# EAGLE board SparkX_smol_ESP32-Panel (EAGLE 9.6.2), part 1 of 15
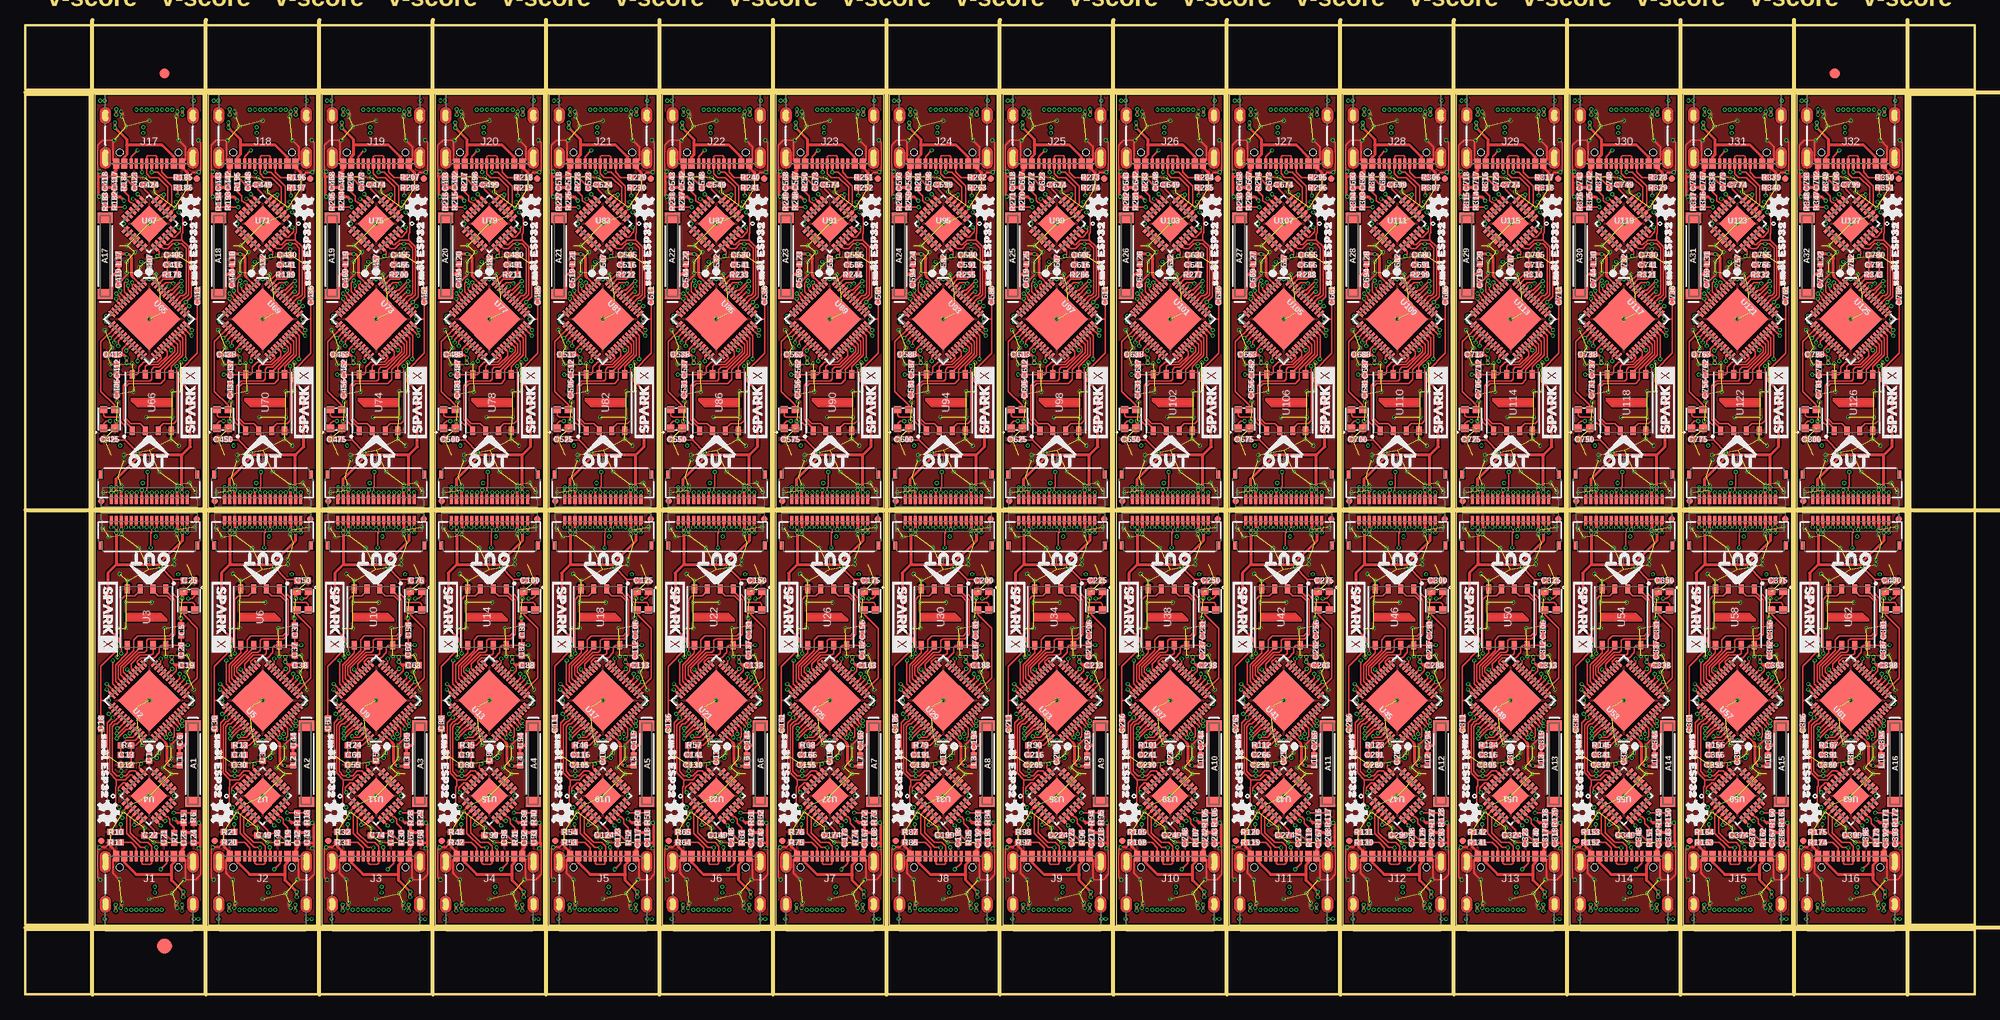
[diagram p0: board, top side]
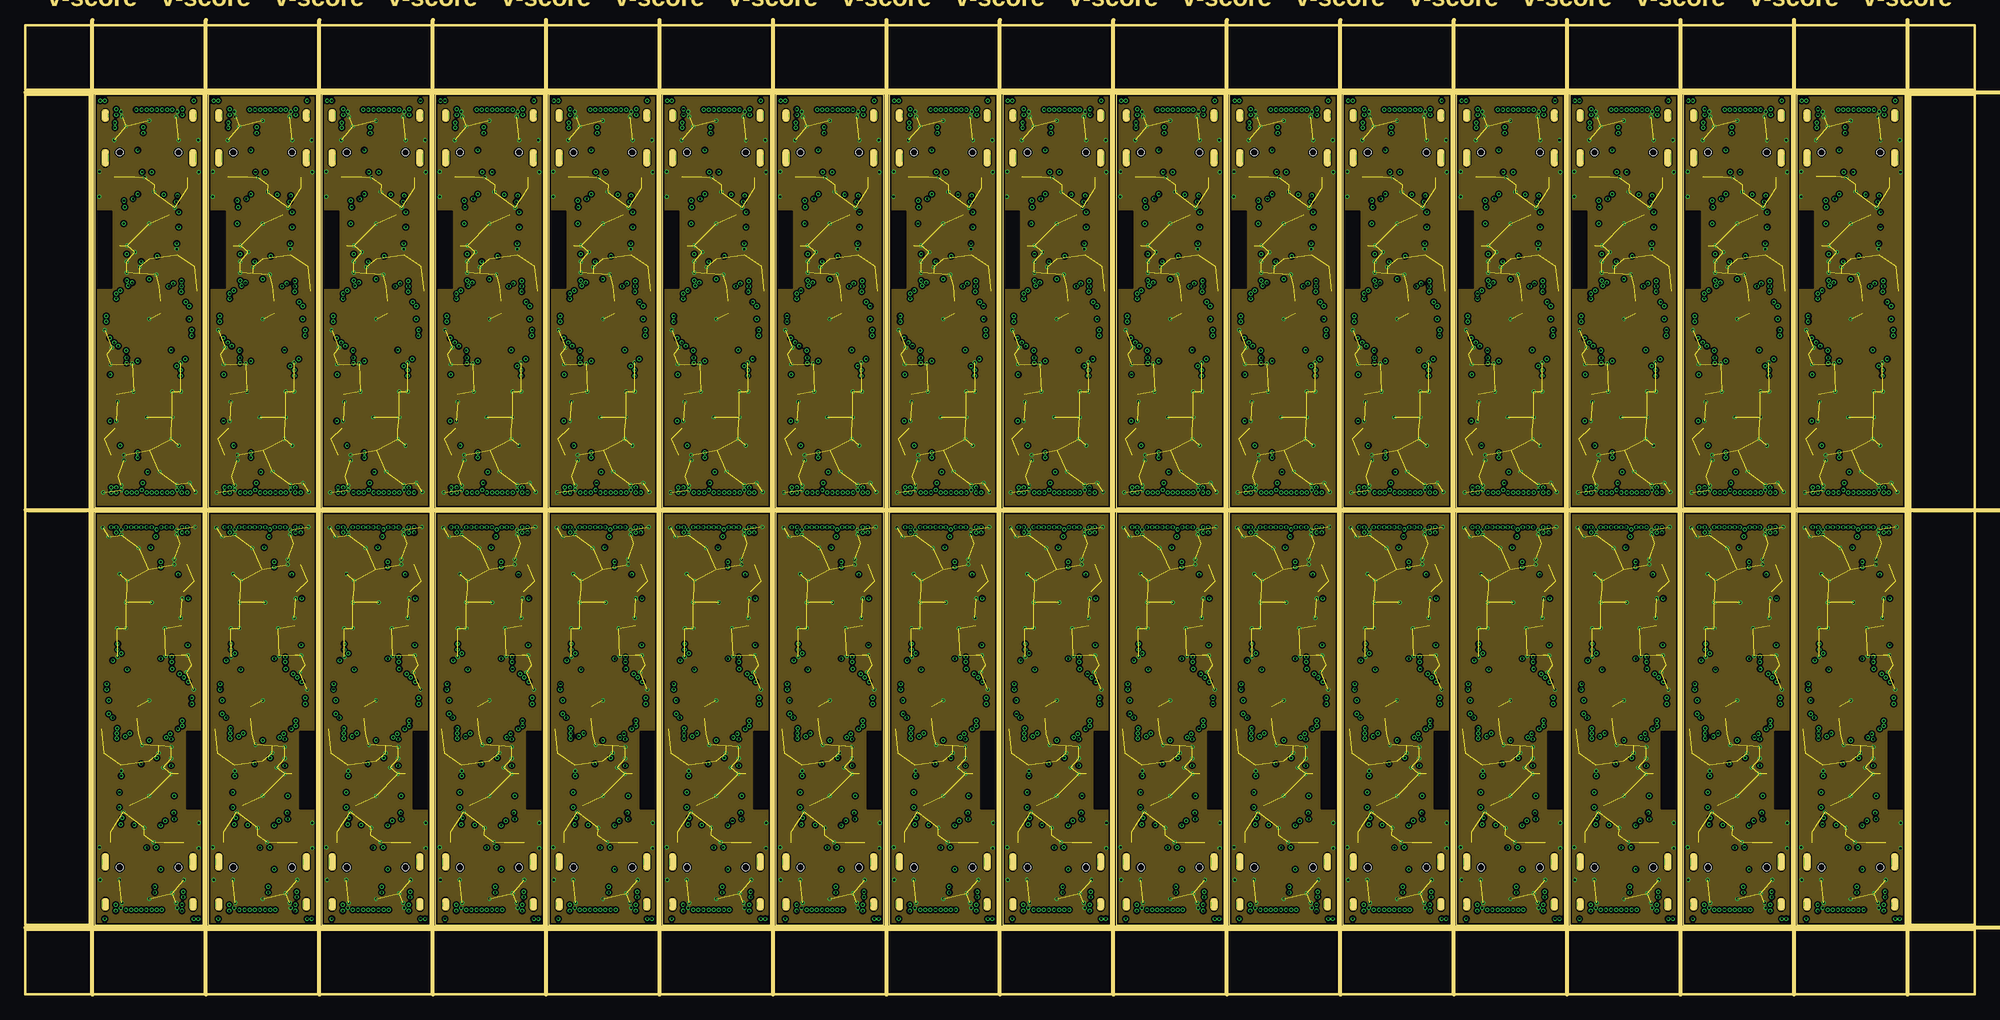
[diagram p1: board, inner layer Route2]
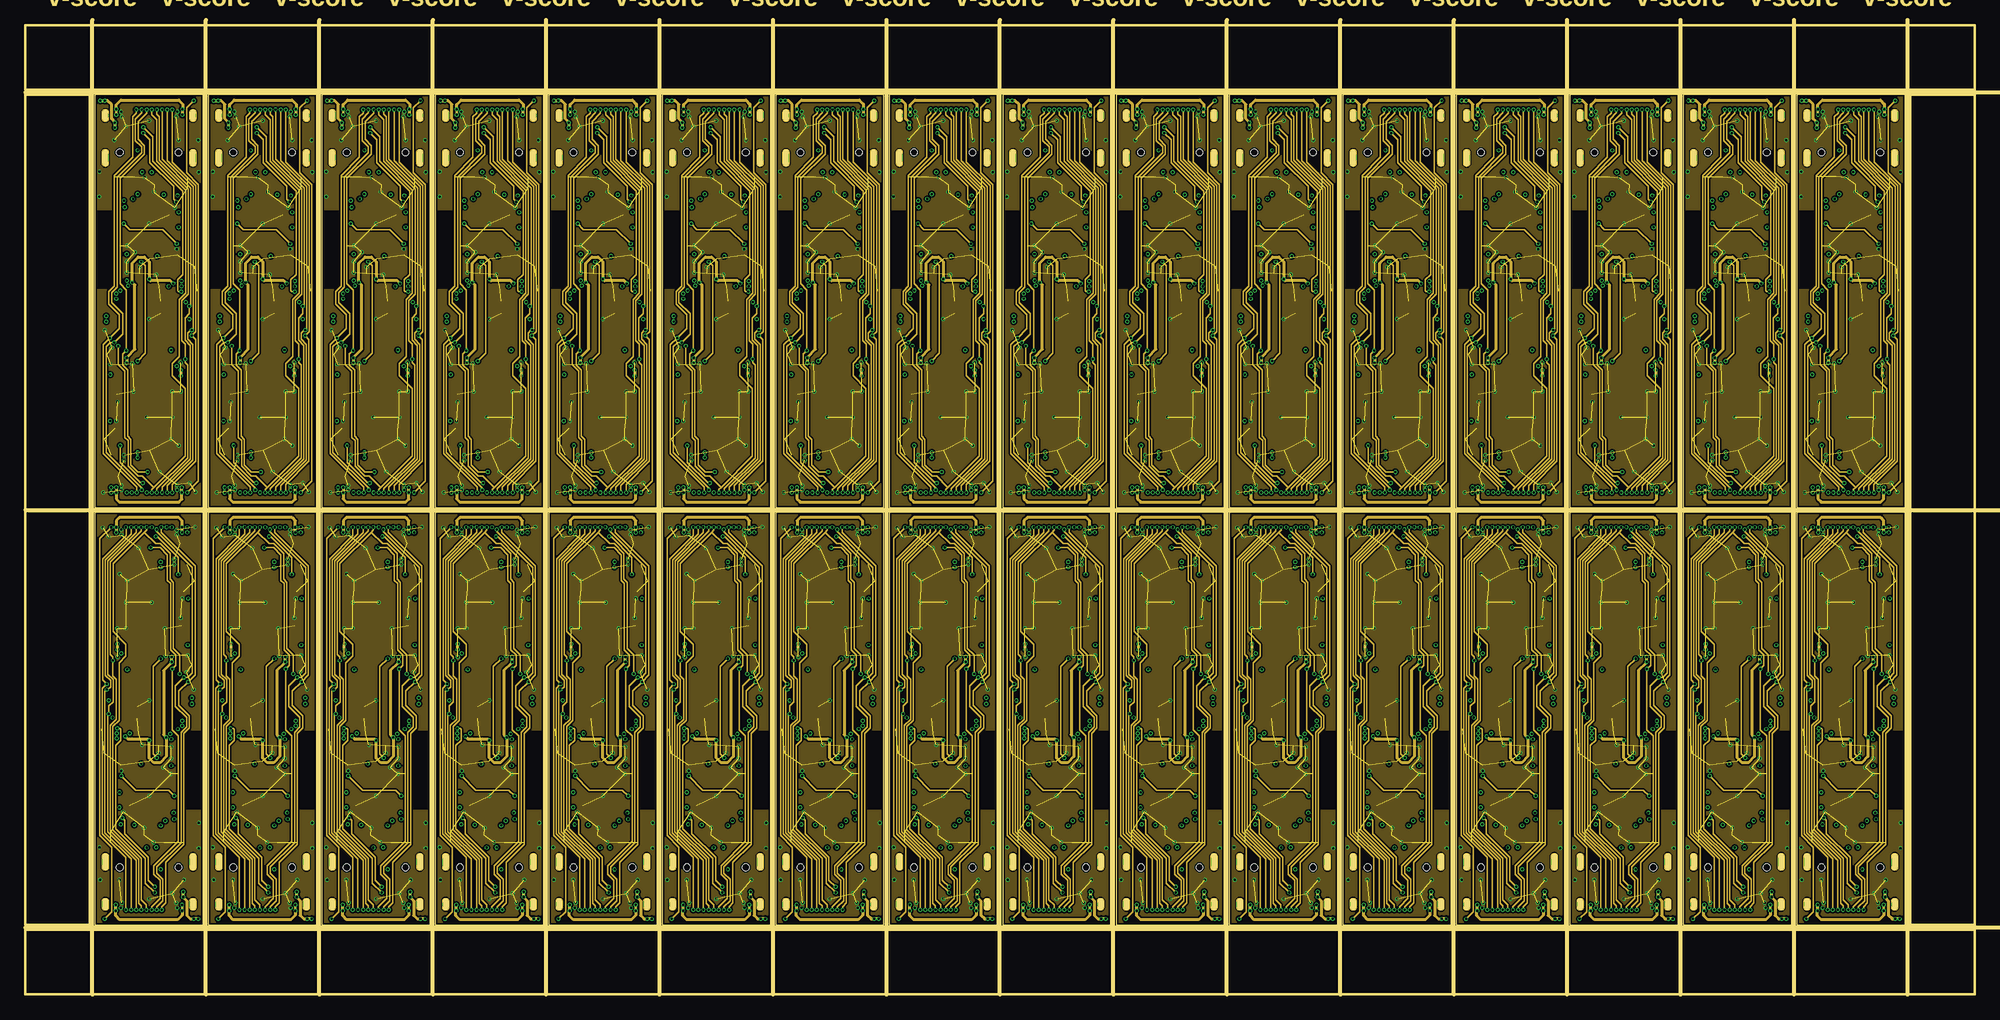
[diagram p2: board, inner layer Route15]
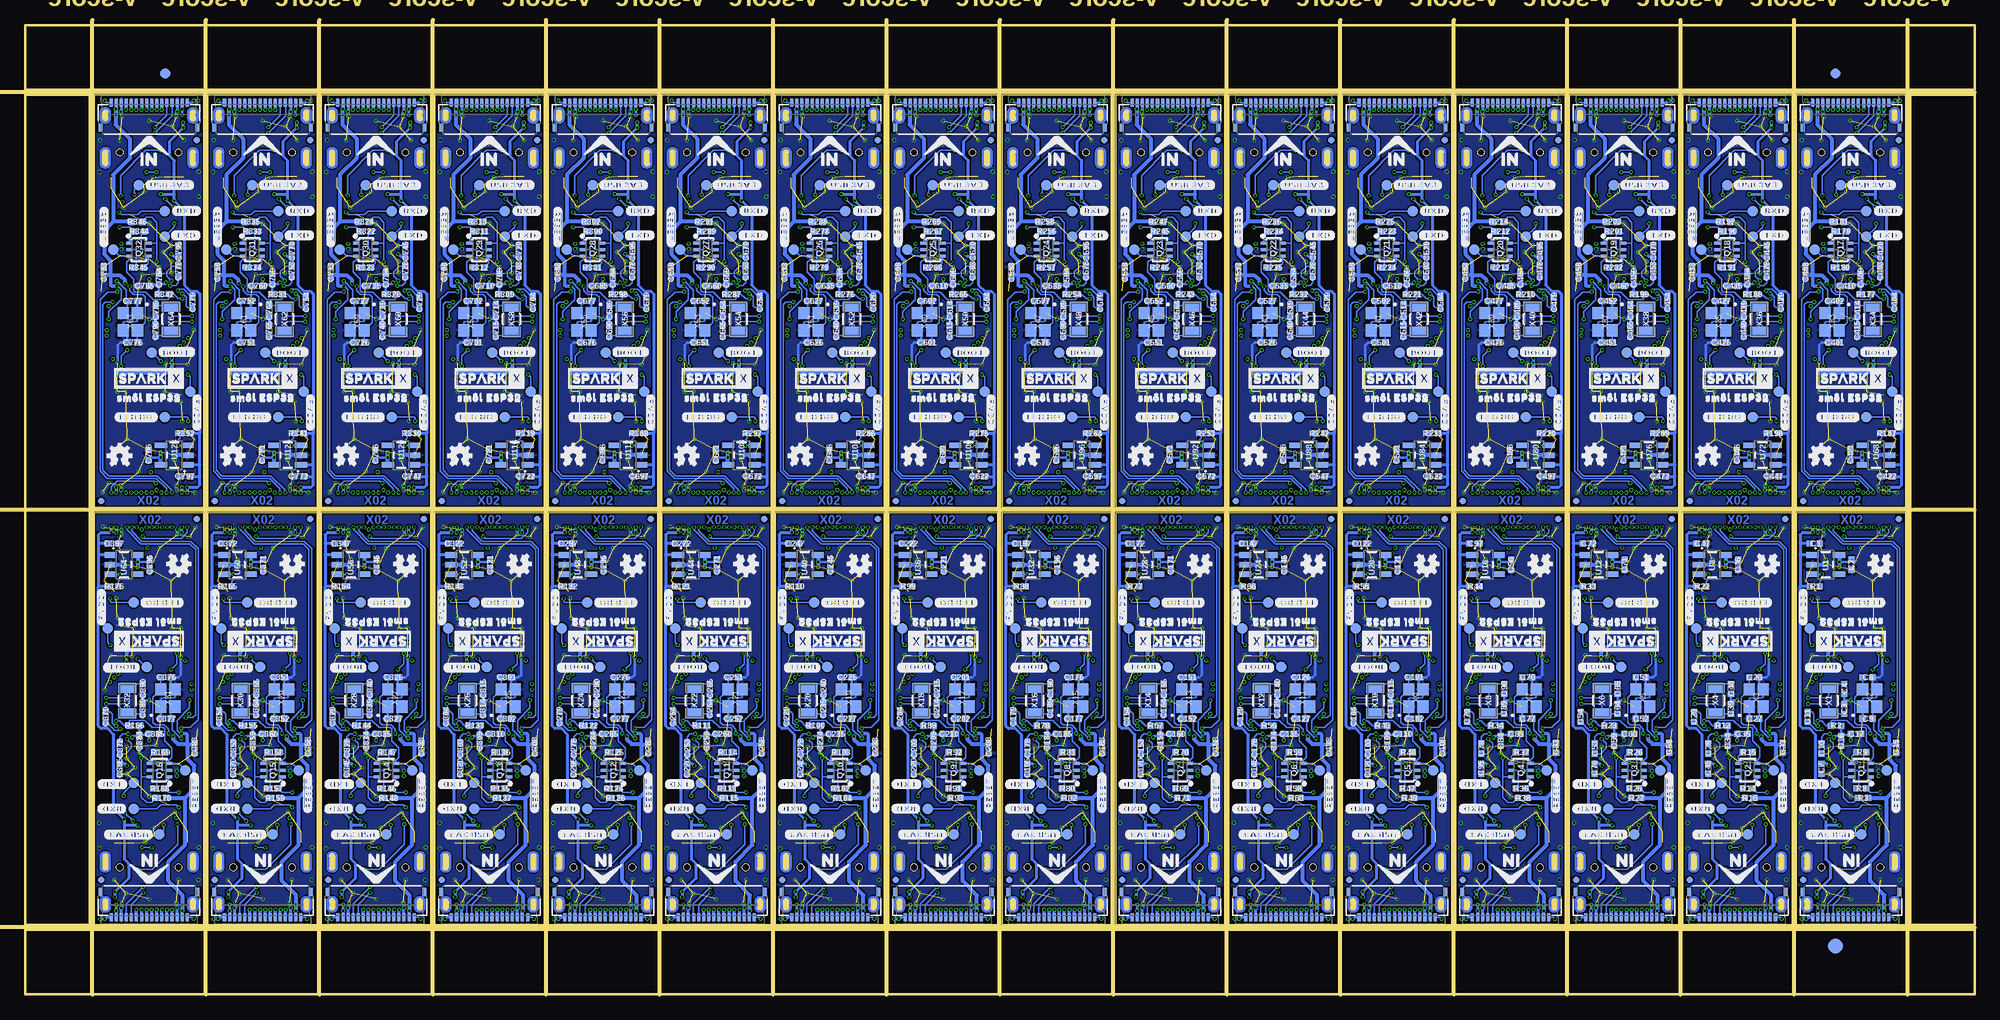
[diagram p3: board, bottom side, seen from below]

Size 192.02 x 95.5 mm. Coordinates in mm from the lower left corner, seen from the top.
Outline: 17.53,6.86 17.53,47.5 6.86,47.5 6.86,6.86 17.53,6.86
Outline: 28.7,6.86 28.7,47.5 18.03,47.5 18.03,6.86 28.7,6.86
Outline: 39.88,6.86 39.88,47.5 29.21,47.5 29.21,6.86 39.88,6.86
Outline: 51.05,6.86 51.05,47.5 40.39,47.5 40.39,6.86 51.05,6.86
Outline: 62.23,6.86 62.23,47.5 51.56,47.5 51.56,6.86 62.23,6.86
Outline: 73.41,6.86 73.41,47.5 62.74,47.5 62.74,6.86 73.41,6.86
Outline: 84.58,6.86 84.58,47.5 73.91,47.5 73.91,6.86 84.58,6.86
Outline: 95.76,6.86 95.76,47.5 85.09,47.5 85.09,6.86 95.76,6.86
Outline: 106.93,6.86 106.93,47.5 96.27,47.5 96.27,6.86 106.93,6.86
Outline: 118.11,6.86 118.11,47.5 107.44,47.5 107.44,6.86 118.11,6.86
Outline: 129.29,6.86 129.29,47.5 118.62,47.5 118.62,6.86 129.29,6.86
Outline: 140.46,6.86 140.46,47.5 129.79,47.5 129.79,6.86 140.46,6.86
Outline: 151.64,6.86 151.64,47.5 140.97,47.5 140.97,6.86 151.64,6.86
Outline: 162.81,6.86 162.81,47.5 152.15,47.5 152.15,6.86 162.81,6.86
Outline: 173.99,6.86 173.99,47.5 163.32,47.5 163.32,6.86 173.99,6.86
Outline: 185.17,6.86 185.17,47.5 174.5,47.5 174.5,6.86 185.17,6.86
Outline: 6.86,88.65 6.86,48.01 17.53,48.01 17.53,88.65 6.86,88.65
Outline: 18.03,88.65 18.03,48.01 28.7,48.01 28.7,88.65 18.03,88.65
Outline: 29.21,88.65 29.21,48.01 39.88,48.01 39.88,88.65 29.21,88.65
Outline: 40.39,88.65 40.39,48.01 51.05,48.01 51.05,88.65 40.39,88.65
Outline: 51.56,88.65 51.56,48.01 62.23,48.01 62.23,88.65 51.56,88.65
Outline: 62.74,88.65 62.74,48.01 73.41,48.01 73.41,88.65 62.74,88.65
Outline: 73.91,88.65 73.91,48.01 84.58,48.01 84.58,88.65 73.91,88.65
Outline: 85.09,88.65 85.09,48.01 95.76,48.01 95.76,88.65 85.09,88.65
Outline: 96.27,88.65 96.27,48.01 106.93,48.01 106.93,88.65 96.27,88.65
Outline: 107.44,88.65 107.44,48.01 118.11,48.01 118.11,88.65 107.44,88.65
Outline: 118.62,88.65 118.62,48.01 129.29,48.01 129.29,88.65 118.62,88.65
Outline: 129.79,88.65 129.79,48.01 140.46,48.01 140.46,88.65 129.79,88.65
Outline: 140.97,88.65 140.97,48.01 151.64,48.01 151.64,88.65 140.97,88.65
Outline: 152.15,88.65 152.15,48.01 162.81,48.01 162.81,88.65 152.15,88.65
Outline: 163.32,88.65 163.32,48.01 173.99,48.01 173.99,88.65 163.32,88.65
Outline: 174.5,88.65 174.5,48.01 185.17,48.01 185.17,88.65 174.5,88.65
Outline: 0,6.35 192.02,6.35 192.02,0 0,0 0,6.35
Outline: 185.67,88.65 192.02,88.65 192.02,6.86 185.67,6.86 185.67,88.65
Outline: 0,95.5 192.02,95.5 192.02,89.15 0,89.15 0,95.5
Outline: 0,88.65 6.35,88.65 6.35,6.86 0,6.86 0,88.65
Copper layers (1+2*15+16): Top 0.035mm / dielectric 0.2mm / Route2 0.0175mm / dielectric 0.265mm / Route15 0.0175mm / dielectric 0.2mm / Bottom 0.035mm
Design rules "SparkX_smol_ESP32": minimum track width 5mil, minimum drill 0.2mm, track to track 5mil, track to pad 5mil, pad to pad 5mil, via to via 5mil, smd to smd 0mil, copper to edge 5mil, drill to drill 5mil, minimum pad ring 3.5mil, minimum via ring 3.5mil, stop-mask expansion 2.5mil, vias tented up to drill 25mil, thermal gap 10mil
Milling: 20 lines

## Footprints (pad centres in the part's own frame; a part is rotated, then mirrored left to right if it is on the bottom)
PAD.03X.04 = smd 1.016 x 1.016: 1 0,0
ANT-2.4GHZ-8.0X1.0MM = smd 1 x 1.5: FEED -3.75,0; NC 3.75,0
0402-TIGHT = smd 0.6 x 0.6: 1 -0.5,0; 2 0.5,0
0402-TIGHT_NO_CREAM = smd 0.6 x 0.6: 1 -0.5,0; 2 0.5,0
WS2812-2020 = smd 0.7 x 0.7: DI -0.915,0.55; DO 0.915,-0.55; GND 0.915,0.55; VCC -0.915,-0.55
FIDUCIAL-1X2 = smd 1 x 1: 1 0,0
FIDUCIAL-1.5X3 = smd 1.5 x 1.5: 1 0,0
FIDUCIAL-MICRO = smd 0.635 x 0.635: 1 0,0
FPC_16_0.5MM = smd 0.3 x 0.8: 1 -3.75,1.35; 2 -3.25,1.35; 3 -2.75,1.35; 4 -2.25,1.35; 5 -1.75,1.35; 6 -1.25,1.35; 7 -0.75,1.35; 8 -0.25,1.35; 9 0.25,1.35; 10 0.75,1.35; 11 1.25,1.35; 12 1.75,1.35; 13 2.25,1.35; 14 2.75,1.35; 15 3.25,1.35; 16 3.75,1.35 | smd 0.4 x 0.8: MP1 -4.75,-1.15; MP2 4.75,-1.15
USB-C-16P_4LAYER-PADS = smd 0.3 x 1: A5 -1.25,-0.34; A6 -0.25,-0.34; A7 0.25,-0.34; A8 1.25,-0.34; B5 1.75,-0.34; B6 0.75,-0.34; B7 -0.75,-0.34; B8 -1.75,-0.34 | smd 0.6 x 1: GND -3.225,-0.34; GND2 3.225,-0.34; VBUS1 -2.45,-0.34; VBUS2 2.45,-0.34 | drill 0.4 pad 0.6 long: SHLD1 -4.318,-0.915; SHLD2 4.318,-0.915; SHLD3 -4.318,-5.095; SHLD4 4.318,-5.095 | hole 0.65: -2.89,-1.445; 2.89,-1.445
SC70-6 = smd 0.3 x 0.66: 1 -0.65,-0.92; 2 0,-0.92; 3 0.65,-0.92; 4 0.65,0.92; 5 0,0.92; 6 -0.65,0.92
SOT23-5 = smd 0.55 x 1.2: 1 -0.95,-1.3; 2 0,-1.3; 3 0.95,-1.3; 4 0.95,1.3; 5 -0.95,1.3
QFN48-0.4MM = smd 0.8 x 0.23: 1 -2.95,2.2; 2 -2.95,1.8; 3 -2.95,1.4; 4 -2.95,1; 5 -2.95,0.6; 6 -2.95,0.2; 7 -2.95,-0.2; 8 -2.95,-0.6; 9 -2.95,-1; 10 -2.95,-1.4; 11 -2.95,-1.8; 12 -2.95,-2.2; 25 2.95,-2.2; 26 2.95,-1.8; 27 2.95,-1.4; 28 2.95,-1; 29 2.95,-0.6; 30 2.95,-0.2; 31 2.95,0.2; 32 2.95,0.6; 33 2.95,1; 34 2.95,1.4; 35 2.95,1.8; 36 2.95,2.2 | smd 0.23 x 0.8: 13 -2.2,-2.95; 14 -1.8,-2.95; 15 -1.4,-2.95; 16 -1,-2.95; 17 -0.6,-2.95; 18 -0.2,-2.95; 19 0.2,-2.95; 20 0.6,-2.95; 21 1,-2.95; 22 1.4,-2.95; 23 1.8,-2.95; 24 2.2,-2.95; 37 2.2,2.95; 38 1.8,2.95; 39 1.4,2.95; 40 1,2.95; 41 0.6,2.95; 42 0.2,2.95; 43 -0.2,2.95; 44 -0.6,2.95; 45 -1,2.95; 46 -1.4,2.95; 47 -1.8,2.95; 48 -2.2,2.95 | smd 4.3 x 4.3: EP 0,0
WSON-8-6X5-SKINNY_CENTERPAD = smd 0.85 x 0.5: 1 -2.775,1.905; 2 -2.775,0.635; 3 -2.775,-0.635; 4 -2.775,-1.905; 5 2.775,-1.905; 6 2.775,-0.635; 7 2.775,0.635; 8 2.775,1.905
QFN24 = smd 0.85 x 0.3: 1 -2.05,1.25; 2 -2.05,0.75; 3 -2.05,0.25; 4 -2.05,-0.25; 5 -2.05,-0.75; 6 -2.05,-1.25; 13 2.05,-1.25; 14 2.05,-0.75; 15 2.05,-0.25; 16 2.05,0.25; 17 2.05,0.75; 18 2.05,1.25 | smd 0.3 x 0.85: 7 -1.25,-2.05; 8 -0.75,-2.05; 9 -0.25,-2.05; 10 0.25,-2.05; 11 0.75,-2.05; 12 1.25,-2.05; 19 1.25,2.05; 20 0.75,2.05; 21 0.25,2.05; 22 -0.25,2.05; 23 -0.75,2.05; 24 -1.25,2.05 | smd 2.55 x 2.55: PAD 0,0
CRYSTAL-SMD-3.2X1.5MM = smd 1 x 1.8: P$1 -1.25,0; P$2 1.25,0
CRYSTAL-SMD-2X2.5MM = smd 1.2 x 1.1: P1 0.846,0.69; P2 -0.854,0.69; P3 -0.854,-0.71; P4 0.846,-0.71

## Placement (x,y rotation side)
!BOOT!  TEST-POINT3X4  [PAD.03X.04]  12.45,32.26 180 bottom
!BOOT!1  TEST-POINT3X4  [PAD.03X.04]  23.62,32.26 180 bottom
!BOOT!2  TEST-POINT3X4  [PAD.03X.04]  34.8,32.26 180 bottom
!BOOT!3  TEST-POINT3X4  [PAD.03X.04]  45.97,32.26 180 bottom
!BOOT!4  TEST-POINT3X4  [PAD.03X.04]  57.15,32.26 180 bottom
!BOOT!5  TEST-POINT3X4  [PAD.03X.04]  68.33,32.26 180 bottom
!BOOT!6  TEST-POINT3X4  [PAD.03X.04]  79.5,32.26 180 bottom
!BOOT!7  TEST-POINT3X4  [PAD.03X.04]  90.68,32.26 180 bottom
!BOOT!8  TEST-POINT3X4  [PAD.03X.04]  101.85,32.26 180 bottom
!BOOT!9  TEST-POINT3X4  [PAD.03X.04]  113.03,32.26 180 bottom
!BOOT!10  TEST-POINT3X4  [PAD.03X.04]  124.21,32.26 180 bottom
!BOOT!11  TEST-POINT3X4  [PAD.03X.04]  135.38,32.26 180 bottom
!BOOT!12  TEST-POINT3X4  [PAD.03X.04]  146.56,32.26 180 bottom
!BOOT!13  TEST-POINT3X4  [PAD.03X.04]  157.73,32.26 180 bottom
!BOOT!14  TEST-POINT3X4  [PAD.03X.04]  168.91,32.26 180 bottom
!BOOT!15  TEST-POINT3X4  [PAD.03X.04]  180.09,32.26 180 bottom
!BOOT!16  TEST-POINT3X4  [PAD.03X.04]  11.94,63.25 0 bottom
!BOOT!17  TEST-POINT3X4  [PAD.03X.04]  23.11,63.25 0 bottom
!BOOT!18  TEST-POINT3X4  [PAD.03X.04]  34.29,63.25 0 bottom
!BOOT!19  TEST-POINT3X4  [PAD.03X.04]  45.47,63.25 0 bottom
!BOOT!20  TEST-POINT3X4  [PAD.03X.04]  56.64,63.25 0 bottom
!BOOT!21  TEST-POINT3X4  [PAD.03X.04]  67.82,63.25 0 bottom
!BOOT!22  TEST-POINT3X4  [PAD.03X.04]  78.99,63.25 0 bottom
!BOOT!23  TEST-POINT3X4  [PAD.03X.04]  90.17,63.25 0 bottom
!BOOT!24  TEST-POINT3X4  [PAD.03X.04]  101.35,63.25 0 bottom
!BOOT!25  TEST-POINT3X4  [PAD.03X.04]  112.52,63.25 0 bottom
!BOOT!26  TEST-POINT3X4  [PAD.03X.04]  123.7,63.25 0 bottom
!BOOT!27  TEST-POINT3X4  [PAD.03X.04]  134.87,63.25 0 bottom
!BOOT!28  TEST-POINT3X4  [PAD.03X.04]  146.05,63.25 0 bottom
!BOOT!29  TEST-POINT3X4  [PAD.03X.04]  157.23,63.25 0 bottom
!BOOT!30  TEST-POINT3X4  [PAD.03X.04]  168.4,63.25 0 bottom
!BOOT!31  TEST-POINT3X4  [PAD.03X.04]  179.58,63.25 0 bottom
!RESET!  TEST-POINT3X4  [PAD.03X.04]  8.64,22.1 180 bottom
!RESET!1  TEST-POINT3X4  [PAD.03X.04]  19.81,22.1 180 bottom
!RESET!2  TEST-POINT3X4  [PAD.03X.04]  30.99,22.1 180 bottom
!RESET!3  TEST-POINT3X4  [PAD.03X.04]  42.16,22.1 180 bottom
!RESET!4  TEST-POINT3X4  [PAD.03X.04]  53.34,22.1 180 bottom
!RESET!5  TEST-POINT3X4  [PAD.03X.04]  64.52,22.1 180 bottom
!RESET!6  TEST-POINT3X4  [PAD.03X.04]  75.69,22.1 180 bottom
!RESET!7  TEST-POINT3X4  [PAD.03X.04]  86.87,22.1 180 bottom
!RESET!8  TEST-POINT3X4  [PAD.03X.04]  98.04,22.1 180 bottom
!RESET!9  TEST-POINT3X4  [PAD.03X.04]  109.22,22.1 180 bottom
!RESET!10  TEST-POINT3X4  [PAD.03X.04]  120.4,22.1 180 bottom
!RESET!11  TEST-POINT3X4  [PAD.03X.04]  131.57,22.1 180 bottom
!RESET!12  TEST-POINT3X4  [PAD.03X.04]  142.75,22.1 180 bottom
!RESET!13  TEST-POINT3X4  [PAD.03X.04]  153.92,22.1 180 bottom
!RESET!14  TEST-POINT3X4  [PAD.03X.04]  165.1,22.1 180 bottom
!RESET!15  TEST-POINT3X4  [PAD.03X.04]  176.28,22.1 180 bottom
!RESET!16  TEST-POINT3X4  [PAD.03X.04]  15.75,73.41 0 bottom
!RESET!17  TEST-POINT3X4  [PAD.03X.04]  26.92,73.41 0 bottom
!RESET!18  TEST-POINT3X4  [PAD.03X.04]  38.1,73.41 0 bottom
!RESET!19  TEST-POINT3X4  [PAD.03X.04]  49.28,73.41 0 bottom
!RESET!20  TEST-POINT3X4  [PAD.03X.04]  60.45,73.41 0 bottom
!RESET!21  TEST-POINT3X4  [PAD.03X.04]  71.63,73.41 0 bottom
!RESET!22  TEST-POINT3X4  [PAD.03X.04]  82.8,73.41 0 bottom
!RESET!23  TEST-POINT3X4  [PAD.03X.04]  93.98,73.41 0 bottom
!RESET!24  TEST-POINT3X4  [PAD.03X.04]  105.16,73.41 0 bottom
!RESET!25  TEST-POINT3X4  [PAD.03X.04]  116.33,73.41 0 bottom
!RESET!26  TEST-POINT3X4  [PAD.03X.04]  127.51,73.41 0 bottom
!RESET!27  TEST-POINT3X4  [PAD.03X.04]  138.68,73.41 0 bottom
!RESET!28  TEST-POINT3X4  [PAD.03X.04]  149.86,73.41 0 bottom
!RESET!29  TEST-POINT3X4  [PAD.03X.04]  161.04,73.41 0 bottom
!RESET!30  TEST-POINT3X4  [PAD.03X.04]  172.21,73.41 0 bottom
!RESET!31  TEST-POINT3X4  [PAD.03X.04]  183.39,73.41 0 bottom
A1  ANTENNA2.4GHZ-8.0X1.0MM  [ANT-2.4GHZ-8.0X1.0MM]  16.51,22.73 270 top
A2  ANTENNA2.4GHZ-8.0X1.0MM  [ANT-2.4GHZ-8.0X1.0MM]  27.69,22.73 270 top
A3  ANTENNA2.4GHZ-8.0X1.0MM  [ANT-2.4GHZ-8.0X1.0MM]  38.86,22.73 270 top
A4  ANTENNA2.4GHZ-8.0X1.0MM  [ANT-2.4GHZ-8.0X1.0MM]  50.04,22.73 270 top
A5  ANTENNA2.4GHZ-8.0X1.0MM  [ANT-2.4GHZ-8.0X1.0MM]  61.21,22.73 270 top
A6  ANTENNA2.4GHZ-8.0X1.0MM  [ANT-2.4GHZ-8.0X1.0MM]  72.39,22.73 270 top
A7  ANTENNA2.4GHZ-8.0X1.0MM  [ANT-2.4GHZ-8.0X1.0MM]  83.57,22.73 270 top
A8  ANTENNA2.4GHZ-8.0X1.0MM  [ANT-2.4GHZ-8.0X1.0MM]  94.74,22.73 270 top
A9  ANTENNA2.4GHZ-8.0X1.0MM  [ANT-2.4GHZ-8.0X1.0MM]  105.92,22.73 270 top
A10  ANTENNA2.4GHZ-8.0X1.0MM  [ANT-2.4GHZ-8.0X1.0MM]  117.09,22.73 270 top
A11  ANTENNA2.4GHZ-8.0X1.0MM  [ANT-2.4GHZ-8.0X1.0MM]  128.27,22.73 270 top
A12  ANTENNA2.4GHZ-8.0X1.0MM  [ANT-2.4GHZ-8.0X1.0MM]  139.45,22.73 270 top
A13  ANTENNA2.4GHZ-8.0X1.0MM  [ANT-2.4GHZ-8.0X1.0MM]  150.62,22.73 270 top
A14  ANTENNA2.4GHZ-8.0X1.0MM  [ANT-2.4GHZ-8.0X1.0MM]  161.8,22.73 270 top
A15  ANTENNA2.4GHZ-8.0X1.0MM  [ANT-2.4GHZ-8.0X1.0MM]  172.97,22.73 270 top
A16  ANTENNA2.4GHZ-8.0X1.0MM  [ANT-2.4GHZ-8.0X1.0MM]  184.15,22.73 270 top
A17  ANTENNA2.4GHZ-8.0X1.0MM  [ANT-2.4GHZ-8.0X1.0MM]  7.87,72.77 90 top
A18  ANTENNA2.4GHZ-8.0X1.0MM  [ANT-2.4GHZ-8.0X1.0MM]  19.05,72.77 90 top
A19  ANTENNA2.4GHZ-8.0X1.0MM  [ANT-2.4GHZ-8.0X1.0MM]  30.23,72.77 90 top
A20  ANTENNA2.4GHZ-8.0X1.0MM  [ANT-2.4GHZ-8.0X1.0MM]  41.4,72.77 90 top
A21  ANTENNA2.4GHZ-8.0X1.0MM  [ANT-2.4GHZ-8.0X1.0MM]  52.58,72.77 90 top
A22  ANTENNA2.4GHZ-8.0X1.0MM  [ANT-2.4GHZ-8.0X1.0MM]  63.75,72.77 90 top
A23  ANTENNA2.4GHZ-8.0X1.0MM  [ANT-2.4GHZ-8.0X1.0MM]  74.93,72.77 90 top
A24  ANTENNA2.4GHZ-8.0X1.0MM  [ANT-2.4GHZ-8.0X1.0MM]  86.11,72.77 90 top
A25  ANTENNA2.4GHZ-8.0X1.0MM  [ANT-2.4GHZ-8.0X1.0MM]  97.28,72.77 90 top
A26  ANTENNA2.4GHZ-8.0X1.0MM  [ANT-2.4GHZ-8.0X1.0MM]  108.46,72.77 90 top
A27  ANTENNA2.4GHZ-8.0X1.0MM  [ANT-2.4GHZ-8.0X1.0MM]  119.63,72.77 90 top
A28  ANTENNA2.4GHZ-8.0X1.0MM  [ANT-2.4GHZ-8.0X1.0MM]  130.81,72.77 90 top
A29  ANTENNA2.4GHZ-8.0X1.0MM  [ANT-2.4GHZ-8.0X1.0MM]  141.99,72.77 90 top
A30  ANTENNA2.4GHZ-8.0X1.0MM  [ANT-2.4GHZ-8.0X1.0MM]  153.16,72.77 90 top
A31  ANTENNA2.4GHZ-8.0X1.0MM  [ANT-2.4GHZ-8.0X1.0MM]  164.34,72.77 90 top
A32  ANTENNA2.4GHZ-8.0X1.0MM  [ANT-2.4GHZ-8.0X1.0MM]  175.51,72.77 90 top
C1  2.2uF  [0402-TIGHT]  15.75,44.45 0 bottom
C2  2.2uF  [0402-TIGHT]  12.13,42.35 270 bottom
C3  15pF  [0402-TIGHT]  12.83,28.13 270 bottom
C4  15pF  [0402-TIGHT]  12.83,30.1 90 bottom
C5  0.1uF  [0402-TIGHT]  15.37,35.88 90 top
C6  DNP  [0402-TIGHT_NO_CREAM]  15.21,24.99 90 top
C7  DNP  [0402-TIGHT_NO_CREAM]  15.08,22.23 270 bottom
C8  12pF  [0402-TIGHT]  10.54,31.24 180 bottom
C9  12pF  [0402-TIGHT]  10.54,27.18 0 bottom
C10  270pF  [0402-TIGHT]  15.08,24.23 90 bottom
C11  270pF  [0402-TIGHT]  16.45,27.34 90 bottom
C12  10nF  [0402-TIGHT]  9.91,22.64 0 top
C13  3.0nF  [0402-TIGHT]  9.91,23.59 180 top
C14  100pF  [0402-TIGHT]  12.19,23.53 270 top
C15  0.1uF  [0402-TIGHT]  7.72,24.29 270 bottom
C16  0.1uF  [0402-TIGHT]  13.14,24.99 270 bottom
C17  10uF  [0402-TIGHT]  11.68,25.69 0 bottom
C18  0.1uF  [0402-TIGHT]  7.46,26.67 270 top
C19  0.1uF  [0402-TIGHT]  15.88,32.45 0 top
C20  1.0uF  [0402-TIGHT]  15.37,33.91 270 top
C21  4.7uF  [0402-TIGHT]  13.65,15.43 270 top
C22  0.1uF  [0402-TIGHT]  12.19,15.68 180 top
C23  0.1uF  [0402-TIGHT]  15.62,15.43 270 top
C24  4.7uF  [0402-TIGHT]  16.57,15.43 270 top
C25  0.1uF  [0402-TIGHT]  16.13,40.77 0 top
C26  12pF  [0402-TIGHT]  21.72,31.24 180 bottom
C27  12pF  [0402-TIGHT]  21.72,27.18 0 bottom
C28  270pF  [0402-TIGHT]  26.26,24.23 90 bottom
C29  270pF  [0402-TIGHT]  27.62,27.34 90 bottom
C30  10nF  [0402-TIGHT]  21.08,22.64 0 top
C31  0.1uF  [0402-TIGHT]  26.54,35.88 90 top
C32  100pF  [0402-TIGHT]  23.37,23.53 270 top
C33  0.1uF  [0402-TIGHT]  18.89,24.29 270 bottom
C34  0.1uF  [0402-TIGHT]  24.32,24.99 270 bottom
C35  10uF  [0402-TIGHT]  22.86,25.69 0 bottom
C36  0.1uF  [0402-TIGHT]  18.64,26.67 270 top
C37  1.0uF  [0402-TIGHT]  26.54,33.91 270 top
C38  0.1uF  [0402-TIGHT]  27.05,32.45 0 top
C39  15pF  [0402-TIGHT]  24,28.13 270 bottom
C40  15pF  [0402-TIGHT]  24,30.1 90 bottom
C41  3.0nF  [0402-TIGHT]  21.08,23.59 180 top
C42  0.1uF  [0402-TIGHT]  26.8,15.43 270 top
C43  4.7uF  [0402-TIGHT]  27.75,15.43 270 top
C44  DNP  [0402-TIGHT_NO_CREAM]  26.38,24.99 90 top
C45  DNP  [0402-TIGHT_NO_CREAM]  26.26,22.23 270 bottom
C46  2.2uF  [0402-TIGHT]  23.3,42.35 270 bottom
C47  2.2uF  [0402-TIGHT]  26.92,44.45 0 bottom
C48  4.7uF  [0402-TIGHT]  24.83,15.43 270 top
C49  0.1uF  [0402-TIGHT]  23.37,15.68 180 top
C50  0.1uF  [0402-TIGHT]  27.3,40.77 0 top
C51  12pF  [0402-TIGHT]  32.89,31.24 180 bottom
C52  12pF  [0402-TIGHT]  32.89,27.18 0 bottom
C53  270pF  [0402-TIGHT]  37.43,24.23 90 bottom
C54  270pF  [0402-TIGHT]  38.8,27.34 90 bottom
C55  10nF  [0402-TIGHT]  32.26,22.64 0 top
C56  0.1uF  [0402-TIGHT]  37.72,35.88 90 top
C57  100pF  [0402-TIGHT]  34.54,23.53 270 top
C58  0.1uF  [0402-TIGHT]  30.07,24.29 270 bottom
C59  0.1uF  [0402-TIGHT]  35.5,24.99 270 bottom
C60  10uF  [0402-TIGHT]  34.04,25.69 0 bottom
C61  0.1uF  [0402-TIGHT]  29.81,26.67 270 top
C62  1.0uF  [0402-TIGHT]  37.72,33.91 270 top
C63  0.1uF  [0402-TIGHT]  38.23,32.45 0 top
C64  15pF  [0402-TIGHT]  35.18,28.13 270 bottom
C65  15pF  [0402-TIGHT]  35.18,30.1 90 bottom
C66  3.0nF  [0402-TIGHT]  32.26,23.59 180 top
C67  0.1uF  [0402-TIGHT]  37.97,15.43 270 top
C68  4.7uF  [0402-TIGHT]  38.93,15.43 270 top
C69  DNP  [0402-TIGHT_NO_CREAM]  37.56,24.99 90 top
C70  DNP  [0402-TIGHT_NO_CREAM]  37.43,22.23 270 bottom
C71  2.2uF  [0402-TIGHT]  34.48,42.35 270 bottom
C72  2.2uF  [0402-TIGHT]  38.1,44.45 0 bottom
C73  4.7uF  [0402-TIGHT]  36,15.43 270 top
C74  0.1uF  [0402-TIGHT]  34.54,15.68 180 top
C75  0.1uF  [0402-TIGHT]  38.48,40.77 0 top
C76  12pF  [0402-TIGHT]  44.07,31.24 180 bottom
C77  12pF  [0402-TIGHT]  44.07,27.18 0 bottom
C78  270pF  [0402-TIGHT]  48.61,24.23 90 bottom
C79  270pF  [0402-TIGHT]  49.97,27.34 90 bottom
C80  10nF  [0402-TIGHT]  43.43,22.64 0 top
C81  0.1uF  [0402-TIGHT]  48.89,35.88 90 top
C82  100pF  [0402-TIGHT]  45.72,23.53 270 top
C83  0.1uF  [0402-TIGHT]  41.24,24.29 270 bottom
C84  0.1uF  [0402-TIGHT]  46.67,24.99 270 bottom
C85  10uF  [0402-TIGHT]  45.21,25.69 0 bottom
C86  0.1uF  [0402-TIGHT]  40.99,26.67 270 top
C87  1.0uF  [0402-TIGHT]  48.89,33.91 270 top
C88  0.1uF  [0402-TIGHT]  49.4,32.45 0 top
C89  15pF  [0402-TIGHT]  46.35,28.13 270 bottom
C90  15pF  [0402-TIGHT]  46.35,30.1 90 bottom
C91  3.0nF  [0402-TIGHT]  43.43,23.59 180 top
C92  0.1uF  [0402-TIGHT]  49.15,15.43 270 top
C93  4.7uF  [0402-TIGHT]  50.1,15.43 270 top
C94  DNP  [0402-TIGHT_NO_CREAM]  48.74,24.99 90 top
C95  DNP  [0402-TIGHT_NO_CREAM]  48.61,22.23 270 bottom
C96  2.2uF  [0402-TIGHT]  45.66,42.35 270 bottom
C97  2.2uF  [0402-TIGHT]  49.28,44.45 0 bottom
C98  4.7uF  [0402-TIGHT]  47.18,15.43 270 top
C99  0.1uF  [0402-TIGHT]  45.72,15.68 180 top
C100  0.1uF  [0402-TIGHT]  49.66,40.77 0 top
C101  12pF  [0402-TIGHT]  55.24,31.24 180 bottom
C102  12pF  [0402-TIGHT]  55.24,27.18 0 bottom
C103  270pF  [0402-TIGHT]  59.79,24.23 90 bottom
C104  270pF  [0402-TIGHT]  61.15,27.34 90 bottom
C105  10nF  [0402-TIGHT]  54.61,22.64 0 top
C106  0.1uF  [0402-TIGHT]  60.07,35.88 90 top
C107  100pF  [0402-TIGHT]  56.9,23.53 270 top
C108  0.1uF  [0402-TIGHT]  52.42,24.29 270 bottom
C109  0.1uF  [0402-TIGHT]  57.85,24.99 270 bottom
C110  10uF  [0402-TIGHT]  56.39,25.69 0 bottom
C111  0.1uF  [0402-TIGHT]  52.17,26.67 270 top
C112  1.0uF  [0402-TIGHT]  60.07,33.91 270 top
C113  0.1uF  [0402-TIGHT]  60.58,32.45 0 top
C114  15pF  [0402-TIGHT]  57.53,28.13 270 bottom
C115  15pF  [0402-TIGHT]  57.53,30.1 90 bottom
C116  3.0nF  [0402-TIGHT]  54.61,23.59 180 top
C117  0.1uF  [0402-TIGHT]  60.32,15.43 270 top
C118  4.7uF  [0402-TIGHT]  61.28,15.43 270 top
C119  DNP  [0402-TIGHT_NO_CREAM]  59.91,24.99 90 top
C120  DNP  [0402-TIGHT_NO_CREAM]  59.79,22.23 270 bottom
C121  2.2uF  [0402-TIGHT]  56.83,42.35 270 bottom
C122  2.2uF  [0402-TIGHT]  60.45,44.45 0 bottom
C123  4.7uF  [0402-TIGHT]  58.36,15.43 270 top
C124  0.1uF  [0402-TIGHT]  56.9,15.68 180 top
C125  0.1uF  [0402-TIGHT]  60.83,40.77 0 top
C126  12pF  [0402-TIGHT]  66.42,31.24 180 bottom
C127  12pF  [0402-TIGHT]  66.42,27.18 0 bottom
C128  270pF  [0402-TIGHT]  70.96,24.23 90 bottom
C129  270pF  [0402-TIGHT]  72.33,27.34 90 bottom
C130  10nF  [0402-TIGHT]  65.79,22.64 0 top
C131  0.1uF  [0402-TIGHT]  71.25,35.88 90 top
C132  100pF  [0402-TIGHT]  68.07,23.53 270 top
C133  0.1uF  [0402-TIGHT]  63.6,24.29 270 bottom
C134  0.1uF  [0402-TIGHT]  69.02,24.99 270 bottom
C135  10uF  [0402-TIGHT]  67.56,25.69 0 bottom
C136  0.1uF  [0402-TIGHT]  63.34,26.67 270 top
C137  1.0uF  [0402-TIGHT]  71.25,33.91 270 top
C138  0.1uF  [0402-TIGHT]  71.76,32.45 0 top
C139  15pF  [0402-TIGHT]  68.71,28.13 270 bottom
C140  15pF  [0402-TIGHT]  68.71,30.1 90 bottom
C141  3.0nF  [0402-TIGHT]  65.79,23.59 180 top
C142  0.1uF  [0402-TIGHT]  71.5,15.43 270 top
C143  4.7uF  [0402-TIGHT]  72.45,15.43 270 top
C144  DNP  [0402-TIGHT_NO_CREAM]  71.09,24.99 90 top
C145  DNP  [0402-TIGHT_NO_CREAM]  70.96,22.23 270 bottom
C146  2.2uF  [0402-TIGHT]  68.01,42.35 270 bottom
C147  2.2uF  [0402-TIGHT]  71.63,44.45 0 bottom
C148  4.7uF  [0402-TIGHT]  69.53,15.43 270 top
C149  0.1uF  [0402-TIGHT]  68.07,15.68 180 top
C150  0.1uF  [0402-TIGHT]  72.01,40.77 0 top
C151  12pF  [0402-TIGHT]  77.6,31.24 180 bottom
C152  12pF  [0402-TIGHT]  77.6,27.18 0 bottom
C153  270pF  [0402-TIGHT]  82.14,24.23 90 bottom
C154  270pF  [0402-TIGHT]  83.5,27.34 90 bottom
C155  10nF  [0402-TIGHT]  76.96,22.64 0 top
C156  0.1uF  [0402-TIGHT]  82.42,35.88 90 top
C157  100pF  [0402-TIGHT]  79.25,23.53 270 top
C158  0.1uF  [0402-TIGHT]  74.77,24.29 270 bottom
C159  0.1uF  [0402-TIGHT]  80.2,24.99 270 bottom
C160  10uF  [0402-TIGHT]  78.74,25.69 0 bottom
C161  0.1uF  [0402-TIGHT]  74.52,26.67 270 top
C162  1.0uF  [0402-TIGHT]  82.42,33.91 270 top
C163  0.1uF  [0402-TIGHT]  82.93,32.45 0 top
C164  15pF  [0402-TIGHT]  79.88,28.13 270 bottom
C165  15pF  [0402-TIGHT]  79.88,30.1 90 bottom
C166  3.0nF  [0402-TIGHT]  76.96,23.59 180 top
C167  0.1uF  [0402-TIGHT]  82.68,15.43 270 top
C168  4.7uF  [0402-TIGHT]  83.63,15.43 270 top
C169  DNP  [0402-TIGHT_NO_CREAM]  82.26,24.99 90 top
C170  DNP  [0402-TIGHT_NO_CREAM]  82.14,22.23 270 bottom
C171  2.2uF  [0402-TIGHT]  79.18,42.35 270 bottom
C172  2.2uF  [0402-TIGHT]  82.8,44.45 0 bottom
C173  4.7uF  [0402-TIGHT]  80.71,15.43 270 top
C174  0.1uF  [0402-TIGHT]  79.25,15.68 180 top
C175  0.1uF  [0402-TIGHT]  83.19,40.77 0 top
C176  12pF  [0402-TIGHT]  88.77,31.24 180 bottom
C177  12pF  [0402-TIGHT]  88.77,27.18 0 bottom
C178  270pF  [0402-TIGHT]  93.31,24.23 90 bottom
C179  270pF  [0402-TIGHT]  94.68,27.34 90 bottom
C180  10nF  [0402-TIGHT]  88.14,22.64 0 top
C181  0.1uF  [0402-TIGHT]  93.6,35.88 90 top
C182  100pF  [0402-TIGHT]  90.42,23.53 270 top
C183  0.1uF  [0402-TIGHT]  85.95,24.29 270 bottom
C184  0.1uF  [0402-TIGHT]  91.38,24.99 270 bottom
C185  10uF  [0402-TIGHT]  89.92,25.69 0 bottom
C186  0.1uF  [0402-TIGHT]  85.69,26.67 270 top
C187  1.0uF  [0402-TIGHT]  93.6,33.91 270 top
C188  0.1uF  [0402-TIGHT]  94.11,32.45 0 top
C189  15pF  [0402-TIGHT]  91.06,28.13 270 bottom
C190  15pF  [0402-TIGHT]  91.06,30.1 90 bottom
C191  3.0nF  [0402-TIGHT]  88.14,23.59 180 top
C192  0.1uF  [0402-TIGHT]  93.85,15.43 270 top
C193  4.7uF  [0402-TIGHT]  94.81,15.43 270 top
C194  DNP  [0402-TIGHT_NO_CREAM]  93.44,24.99 90 top
C195  DNP  [0402-TIGHT_NO_CREAM]  93.31,22.23 270 bottom
C196  2.2uF  [0402-TIGHT]  90.36,42.35 270 bottom
C197  2.2uF  [0402-TIGHT]  93.98,44.45 0 bottom
C198  4.7uF  [0402-TIGHT]  91.88,15.43 270 top
C199  0.1uF  [0402-TIGHT]  90.42,15.68 180 top
C200  0.1uF  [0402-TIGHT]  94.36,40.77 0 top
C201  12pF  [0402-TIGHT]  99.95,31.24 180 bottom
C202  12pF  [0402-TIGHT]  99.95,27.18 0 bottom
C203  270pF  [0402-TIGHT]  104.49,24.23 90 bottom
C204  270pF  [0402-TIGHT]  105.85,27.34 90 bottom
C205  10nF  [0402-TIGHT]  99.31,22.64 0 top
C206  0.1uF  [0402-TIGHT]  104.78,35.88 90 top
C207  100pF  [0402-TIGHT]  101.6,23.53 270 top
C208  0.1uF  [0402-TIGHT]  97.12,24.29 270 bottom
C209  0.1uF  [0402-TIGHT]  102.55,24.99 270 bottom
C210  10uF  [0402-TIGHT]  101.09,25.69 0 bottom
C211  0.1uF  [0402-TIGHT]  96.87,26.67 270 top
C212  1.0uF  [0402-TIGHT]  104.78,33.91 270 top
C213  0.1uF  [0402-TIGHT]  105.28,32.45 0 top
C214  15pF  [0402-TIGHT]  102.23,28.13 270 bottom
C215  15pF  [0402-TIGHT]  102.23,30.1 90 bottom
C216  3.0nF  [0402-TIGHT]  99.31,23.59 180 top
C217  0.1uF  [0402-TIGHT]  105.03,15.43 270 top
C218  4.7uF  [0402-TIGHT]  105.98,15.43 270 top
C219  DNP  [0402-TIGHT_NO_CREAM]  104.62,24.99 90 top
C220  DNP  [0402-TIGHT_NO_CREAM]  104.49,22.23 270 bottom
C221  2.2uF  [0402-TIGHT]  101.54,42.35 270 bottom
C222  2.2uF  [0402-TIGHT]  105.16,44.45 0 bottom
C223  4.7uF  [0402-TIGHT]  103.06,15.43 270 top
C224  0.1uF  [0402-TIGHT]  101.6,15.68 180 top
C225  0.1uF  [0402-TIGHT]  105.54,40.77 0 top
C226  12pF  [0402-TIGHT]  111.12,31.24 180 bottom
C227  12pF  [0402-TIGHT]  111.12,27.18 0 bottom
C228  270pF  [0402-TIGHT]  115.67,24.23 90 bottom
C229  270pF  [0402-TIGHT]  117.03,27.34 90 bottom
C230  10nF  [0402-TIGHT]  110.49,22.64 0 top
C231  0.1uF  [0402-TIGHT]  115.95,35.88 90 top
C232  100pF  [0402-TIGHT]  112.78,23.53 270 top
C233  0.1uF  [0402-TIGHT]  108.3,24.29 270 bottom
C234  0.1uF  [0402-TIGHT]  113.73,24.99 270 bottom
C235  10uF  [0402-TIGHT]  112.27,25.69 0 bottom
C236  0.1uF  [0402-TIGHT]  108.05,26.67 270 top
C237  1.0uF  [0402-TIGHT]  115.95,33.91 270 top
C238  0.1uF  [0402-TIGHT]  116.46,32.45 0 top
C239  15pF  [0402-TIGHT]  113.41,28.13 270 bottom
C240  15pF  [0402-TIGHT]  113.41,30.1 90 bottom
C241  3.0nF  [0402-TIGHT]  110.49,23.59 180 top
C242  0.1uF  [0402-TIGHT]  116.2,15.43 270 top
C243  4.7uF  [0402-TIGHT]  117.16,15.43 270 top
C244  DNP  [0402-TIGHT_NO_CREAM]  115.79,24.99 90 top
C245  DNP  [0402-TIGHT_NO_CREAM]  115.67,22.23 270 bottom
C246  2.2uF  [0402-TIGHT]  112.71,42.35 270 bottom
C247  2.2uF  [0402-TIGHT]  116.33,44.45 0 bottom
C248  4.7uF  [0402-TIGHT]  114.24,15.43 270 top
C249  0.1uF  [0402-TIGHT]  112.78,15.68 180 top
C250  0.1uF  [0402-TIGHT]  116.71,40.77 0 top
C251  12pF  [0402-TIGHT]  122.3,31.24 180 bottom
C252  12pF  [0402-TIGHT]  122.3,27.18 0 bottom
C253  270pF  [0402-TIGHT]  126.84,24.23 90 bottom
C254  270pF  [0402-TIGHT]  128.21,27.34 90 bottom
C255  10nF  [0402-TIGHT]  121.67,22.64 0 top
C256  0.1uF  [0402-TIGHT]  127.13,35.88 90 top
C257  100pF  [0402-TIGHT]  123.95,23.53 270 top
C258  0.1uF  [0402-TIGHT]  119.48,24.29 270 bottom
C259  0.1uF  [0402-TIGHT]  124.9,24.99 270 bottom
C260  10uF  [0402-TIGHT]  123.44,25.69 0 bottom
C261  0.1uF  [0402-TIGHT]  119.22,26.67 270 top
C262  1.0uF  [0402-TIGHT]  127.13,33.91 270 top
C263  0.1uF  [0402-TIGHT]  127.64,32.45 0 top
C264  15pF  [0402-TIGHT]  124.59,28.13 270 bottom
C265  15pF  [0402-TIGHT]  124.59,30.1 90 bottom
C266  3.0nF  [0402-TIGHT]  121.67,23.59 180 top
C267  0.1uF  [0402-TIGHT]  127.38,15.43 270 top
C268  4.7uF  [0402-TIGHT]  128.33,15.43 270 top
C269  DNP  [0402-TIGHT_NO_CREAM]  126.97,24.99 90 top
C270  DNP  [0402-TIGHT_NO_CREAM]  126.84,22.23 270 bottom
C271  2.2uF  [0402-TIGHT]  123.89,42.35 270 bottom
C272  2.2uF  [0402-TIGHT]  127.51,44.45 0 bottom
C273  4.7uF  [0402-TIGHT]  125.41,15.43 270 top
C274  0.1uF  [0402-TIGHT]  123.95,15.68 180 top
C275  0.1uF  [0402-TIGHT]  127.89,40.77 0 top
C276  12pF  [0402-TIGHT]  133.48,31.24 180 bottom
C277  12pF  [0402-TIGHT]  133.48,27.18 0 bottom
C278  270pF  [0402-TIGHT]  138.02,24.23 90 bottom
C279  270pF  [0402-TIGHT]  139.38,27.34 90 bottom
C280  10nF  [0402-TIGHT]  132.84,22.64 0 top
C281  0.1uF  [0402-TIGHT]  138.3,35.88 90 top
C282  100pF  [0402-TIGHT]  135.13,23.53 270 top
C283  0.1uF  [0402-TIGHT]  130.65,24.29 270 bottom
C284  0.1uF  [0402-TIGHT]  136.08,24.99 270 bottom
C285  10uF  [0402-TIGHT]  134.62,25.69 0 bottom
C286  0.1uF  [0402-TIGHT]  130.4,26.67 270 top
C287  1.0uF  [0402-TIGHT]  138.3,33.91 270 top
C288  0.1uF  [0402-TIGHT]  138.81,32.45 0 top
C289  15pF  [0402-TIGHT]  135.76,28.13 270 bottom
C290  15pF  [0402-TIGHT]  135.76,30.1 90 bottom
C291  3.0nF  [0402-TIGHT]  132.84,23.59 180 top
C292  0.1uF  [0402-TIGHT]  138.56,15.43 270 top
C293  4.7uF  [0402-TIGHT]  139.51,15.43 270 top
C294  DNP  [0402-TIGHT_NO_CREAM]  138.14,24.99 90 top
C295  DNP  [0402-TIGHT_NO_CREAM]  138.02,22.23 270 bottom
C296  2.2uF  [0402-TIGHT]  135.06,42.35 270 bottom
C297  2.2uF  [0402-TIGHT]  138.68,44.45 0 bottom
C298  4.7uF  [0402-TIGHT]  136.59,15.43 270 top
C299  0.1uF  [0402-TIGHT]  135.13,15.68 180 top
C300  0.1uF  [0402-TIGHT]  139.06,40.77 0 top
C301  12pF  [0402-TIGHT]  144.65,31.24 180 bottom
C302  12pF  [0402-TIGHT]  144.65,27.18 0 bottom
C303  270pF  [0402-TIGHT]  149.19,24.23 90 bottom
C304  270pF  [0402-TIGHT]  150.56,27.34 90 bottom
C305  10nF  [0402-TIGHT]  144.02,22.64 0 top
C306  0.1uF  [0402-TIGHT]  149.48,35.88 90 top
C307  100pF  [0402-TIGHT]  146.3,23.53 270 top
C308  0.1uF  [0402-TIGHT]  141.83,24.29 270 bottom
C309  0.1uF  [0402-TIGHT]  147.26,24.99 270 bottom
C310  10uF  [0402-TIGHT]  145.8,25.69 0 bottom
C311  0.1uF  [0402-TIGHT]  141.57,26.67 270 top
C312  1.0uF  [0402-TIGHT]  149.48,33.91 270 top
C313  0.1uF  [0402-TIGHT]  149.99,32.45 0 top
C314  15pF  [0402-TIGHT]  146.94,28.13 270 bottom
C315  15pF  [0402-TIGHT]  146.94,30.1 90 bottom
C316  3.0nF  [0402-TIGHT]  144.02,23.59 180 top
C317  0.1uF  [0402-TIGHT]  149.73,15.43 270 top
C318  4.7uF  [0402-TIGHT]  150.69,15.43 270 top
C319  DNP  [0402-TIGHT_NO_CREAM]  149.32,24.99 90 top
C320  DNP  [0402-TIGHT_NO_CREAM]  149.19,22.23 270 bottom
C321  2.2uF  [0402-TIGHT]  146.24,42.35 270 bottom
C322  2.2uF  [0402-TIGHT]  149.86,44.45 0 bottom
C323  4.7uF  [0402-TIGHT]  147.76,15.43 270 top
C324  0.1uF  [0402-TIGHT]  146.3,15.68 180 top
C325  0.1uF  [0402-TIGHT]  150.24,40.77 0 top
C326  12pF  [0402-TIGHT]  155.83,31.24 180 bottom
C327  12pF  [0402-TIGHT]  155.83,27.18 0 bottom
C328  270pF  [0402-TIGHT]  160.37,24.23 90 bottom
C329  270pF  [0402-TIGHT]  161.73,27.34 90 bottom
C330  10nF  [0402-TIGHT]  155.19,22.64 0 top
C331  0.1uF  [0402-TIGHT]  160.66,35.88 90 top
C332  100pF  [0402-TIGHT]  157.48,23.53 270 top
C333  0.1uF  [0402-TIGHT]  153,24.29 270 bottom
C334  0.1uF  [0402-TIGHT]  158.43,24.99 270 bottom
C335  10uF  [0402-TIGHT]  156.97,25.69 0 bottom
C336  0.1uF  [0402-TIGHT]  152.75,26.67 270 top
C337  1.0uF  [0402-TIGHT]  160.66,33.91 270 top
C338  0.1uF  [0402-TIGHT]  161.16,32.45 0 top
C339  15pF  [0402-TIGHT]  158.12,28.13 270 bottom
C340  15pF  [0402-TIGHT]  158.12,30.1 90 bottom
C341  3.0nF  [0402-TIGHT]  155.19,23.59 180 top
C342  0.1uF  [0402-TIGHT]  160.91,15.43 270 top
C343  4.7uF  [0402-TIGHT]  161.86,15.43 270 top
C344  DNP  [0402-TIGHT_NO_CREAM]  160.5,24.99 90 top
C345  DNP  [0402-TIGHT_NO_CREAM]  160.37,22.23 270 bottom
C346  2.2uF  [0402-TIGHT]  157.42,42.35 270 bottom
C347  2.2uF  [0402-TIGHT]  161.04,44.45 0 bottom
C348  4.7uF  [0402-TIGHT]  158.94,15.43 270 top
C349  0.1uF  [0402-TIGHT]  157.48,15.68 180 top
C350  0.1uF  [0402-TIGHT]  161.42,40.77 0 top
C351  12pF  [0402-TIGHT]  167,31.24 180 bottom
C352  12pF  [0402-TIGHT]  167,27.18 0 bottom
C353  270pF  [0402-TIGHT]  171.55,24.23 90 bottom
C354  270pF  [0402-TIGHT]  172.91,27.34 90 bottom
C355  10nF  [0402-TIGHT]  166.37,22.64 0 top
C356  0.1uF  [0402-TIGHT]  171.83,35.88 90 top
C357  100pF  [0402-TIGHT]  168.66,23.53 270 top
C358  0.1uF  [0402-TIGHT]  164.18,24.29 270 bottom
C359  0.1uF  [0402-TIGHT]  169.61,24.99 270 bottom
C360  10uF  [0402-TIGHT]  168.15,25.69 0 bottom
C361  0.1uF  [0402-TIGHT]  163.93,26.67 270 top
C362  1.0uF  [0402-TIGHT]  171.83,33.91 270 top
C363  0.1uF  [0402-TIGHT]  172.34,32.45 0 top
C364  15pF  [0402-TIGHT]  169.29,28.13 270 bottom
C365  15pF  [0402-TIGHT]  169.29,30.1 90 bottom
C366  3.0nF  [0402-TIGHT]  166.37,23.59 180 top
C367  0.1uF  [0402-TIGHT]  172.09,15.43 270 top
C368  4.7uF  [0402-TIGHT]  173.04,15.43 270 top
C369  DNP  [0402-TIGHT_NO_CREAM]  171.67,24.99 90 top
C370  DNP  [0402-TIGHT_NO_CREAM]  171.55,22.23 270 bottom
C371  2.2uF  [0402-TIGHT]  168.59,42.35 270 bottom
C372  2.2uF  [0402-TIGHT]  172.21,44.45 0 bottom
C373  4.7uF  [0402-TIGHT]  170.12,15.43 270 top
C374  0.1uF  [0402-TIGHT]  168.66,15.68 180 top
C375  0.1uF  [0402-TIGHT]  172.59,40.77 0 top
C376  12pF  [0402-TIGHT]  178.18,31.24 180 bottom
C377  12pF  [0402-TIGHT]  178.18,27.18 0 bottom
C378  270pF  [0402-TIGHT]  182.72,24.23 90 bottom
C379  270pF  [0402-TIGHT]  184.09,27.34 90 bottom
C380  10nF  [0402-TIGHT]  177.55,22.64 0 top
C381  0.1uF  [0402-TIGHT]  183.01,35.88 90 top
C382  100pF  [0402-TIGHT]  179.83,23.53 270 top
C383  0.1uF  [0402-TIGHT]  175.36,24.29 270 bottom
C384  0.1uF  [0402-TIGHT]  180.78,24.99 270 bottom
C385  10uF  [0402-TIGHT]  179.32,25.69 0 bottom
C386  0.1uF  [0402-TIGHT]  175.1,26.67 270 top
C387  1.0uF  [0402-TIGHT]  183.01,33.91 270 top
C388  0.1uF  [0402-TIGHT]  183.52,32.45 0 top
C389  15pF  [0402-TIGHT]  180.47,28.13 270 bottom
C390  15pF  [0402-TIGHT]  180.47,30.1 90 bottom
C391  3.0nF  [0402-TIGHT]  177.55,23.59 180 top
C392  0.1uF  [0402-TIGHT]  183.26,15.43 270 top
C393  4.7uF  [0402-TIGHT]  184.21,15.43 270 top
C394  DNP  [0402-TIGHT_NO_CREAM]  182.85,24.99 90 top
C395  DNP  [0402-TIGHT_NO_CREAM]  182.72,22.23 270 bottom
C396  2.2uF  [0402-TIGHT]  179.77,42.35 270 bottom
C397  2.2uF  [0402-TIGHT]  183.39,44.45 0 bottom
C398  4.7uF  [0402-TIGHT]  181.29,15.43 270 top
C399  0.1uF  [0402-TIGHT]  179.83,15.68 180 top
C400  0.1uF  [0402-TIGHT]  183.77,40.77 0 top
C401  12pF  [0402-TIGHT]  13.84,64.26 0 bottom
C402  12pF  [0402-TIGHT]  13.84,68.33 180 bottom
C403  270pF  [0402-TIGHT]  9.3,71.28 270 bottom
C404  270pF  [0402-TIGHT]  7.94,68.17 270 bottom
C405  10nF  [0402-TIGHT]  14.48,72.87 180 top
C406  0.1uF  [0402-TIGHT]  9.02,59.63 270 top
C407  100pF  [0402-TIGHT]  12.19,71.98 90 top
C408  0.1uF  [0402-TIGHT]  16.67,71.22 90 bottom
C409  0.1uF  [0402-TIGHT]  11.24,70.52 90 bottom
C410  10uF  [0402-TIGHT]  12.7,69.82 180 bottom
C411  0.1uF  [0402-TIGHT]  16.92,68.83 90 top
C412  1.0uF  [0402-TIGHT]  9.02,61.59 90 top
C413  0.1uF  [0402-TIGHT]  8.51,63.06 180 top
C414  15pF  [0402-TIGHT]  11.56,67.37 90 bottom
C415  15pF  [0402-TIGHT]  11.56,65.41 270 bottom
C416  3.0nF  [0402-TIGHT]  14.48,71.91 0 top
C417  0.1uF  [0402-TIGHT]  8.76,80.07 90 top
C418  4.7uF  [0402-TIGHT]  7.81,80.07 90 top
C419  DNP  [0402-TIGHT_NO_CREAM]  9.18,70.52 270 top
C420  DNP  [0402-TIGHT_NO_CREAM]  9.3,73.28 90 bottom
C421  2.2uF  [0402-TIGHT]  12.26,53.15 90 bottom
C422  2.2uF  [0402-TIGHT]  8.64,51.05 180 bottom
C423  4.7uF  [0402-TIGHT]  10.73,80.07 90 top
C424  0.1uF  [0402-TIGHT]  12.19,79.82 0 top
C425  0.1uF  [0402-TIGHT]  8.25,54.74 180 top
C426  12pF  [0402-TIGHT]  25.02,64.26 0 bottom
C427  12pF  [0402-TIGHT]  25.02,68.33 180 bottom
C428  270pF  [0402-TIGHT]  20.48,71.28 270 bottom
C429  270pF  [0402-TIGHT]  19.11,68.17 270 bottom
C430  10nF  [0402-TIGHT]  25.65,72.87 180 top
C431  0.1uF  [0402-TIGHT]  20.19,59.63 270 top
C432  100pF  [0402-TIGHT]  23.37,71.98 90 top
C433  0.1uF  [0402-TIGHT]  27.84,71.22 90 bottom
C434  0.1uF  [0402-TIGHT]  22.42,70.52 90 bottom
C435  10uF  [0402-TIGHT]  23.88,69.82 180 bottom
C436  0.1uF  [0402-TIGHT]  28.1,68.83 90 top
C437  1.0uF  [0402-TIGHT]  20.19,61.59 90 top
C438  0.1uF  [0402-TIGHT]  19.68,63.06 180 top
C439  15pF  [0402-TIGHT]  22.73,67.37 90 bottom
C440  15pF  [0402-TIGHT]  22.73,65.41 270 bottom
C441  3.0nF  [0402-TIGHT]  25.65,71.91 0 top
C442  0.1uF  [0402-TIGHT]  19.94,80.07 90 top
C443  4.7uF  [0402-TIGHT]  18.99,80.07 90 top
C444  DNP  [0402-TIGHT_NO_CREAM]  20.35,70.52 270 top
C445  DNP  [0402-TIGHT_NO_CREAM]  20.48,73.28 90 bottom
C446  2.2uF  [0402-TIGHT]  23.43,53.15 90 bottom
C447  2.2uF  [0402-TIGHT]  19.81,51.05 180 bottom
C448  4.7uF  [0402-TIGHT]  21.91,80.07 90 top
C449  0.1uF  [0402-TIGHT]  23.37,79.82 0 top
C450  0.1uF  [0402-TIGHT]  19.43,54.74 180 top
C451  12pF  [0402-TIGHT]  36.2,64.26 0 bottom
C452  12pF  [0402-TIGHT]  36.2,68.33 180 bottom
C453  270pF  [0402-TIGHT]  31.65,71.28 270 bottom
C454  270pF  [0402-TIGHT]  30.29,68.17 270 bottom
C455  10nF  [0402-TIGHT]  36.83,72.87 180 top
C456  0.1uF  [0402-TIGHT]  31.37,59.63 270 top
C457  100pF  [0402-TIGHT]  34.54,71.98 90 top
C458  0.1uF  [0402-TIGHT]  39.02,71.22 90 bottom
C459  0.1uF  [0402-TIGHT]  33.59,70.52 90 bottom
C460  10uF  [0402-TIGHT]  35.05,69.82 180 bottom
C461  0.1uF  [0402-TIGHT]  39.27,68.83 90 top
C462  1.0uF  [0402-TIGHT]  31.37,61.59 90 top
C463  0.1uF  [0402-TIGHT]  30.86,63.06 180 top
C464  15pF  [0402-TIGHT]  33.91,67.37 90 bottom
C465  15pF  [0402-TIGHT]  33.91,65.41 270 bottom
C466  3.0nF  [0402-TIGHT]  36.83,71.91 0 top
C467  0.1uF  [0402-TIGHT]  31.12,80.07 90 top
C468  4.7uF  [0402-TIGHT]  30.16,80.07 90 top
C469  DNP  [0402-TIGHT_NO_CREAM]  31.53,70.52 270 top
C470  DNP  [0402-TIGHT_NO_CREAM]  31.65,73.28 90 bottom
C471  2.2uF  [0402-TIGHT]  34.61,53.15 90 bottom
C472  2.2uF  [0402-TIGHT]  30.99,51.05 180 bottom
C473  4.7uF  [0402-TIGHT]  33.08,80.07 90 top
C474  0.1uF  [0402-TIGHT]  34.54,79.82 0 top
C475  0.1uF  [0402-TIGHT]  30.61,54.74 180 top
C476  12pF  [0402-TIGHT]  47.37,64.26 0 bottom
C477  12pF  [0402-TIGHT]  47.37,68.33 180 bottom
C478  270pF  [0402-TIGHT]  42.83,71.28 270 bottom
C479  270pF  [0402-TIGHT]  41.47,68.17 270 bottom
C480  10nF  [0402-TIGHT]  48.01,72.87 180 top
C481  0.1uF  [0402-TIGHT]  42.54,59.63 270 top
C482  100pF  [0402-TIGHT]  45.72,71.98 90 top
C483  0.1uF  [0402-TIGHT]  50.2,71.22 90 bottom
C484  0.1uF  [0402-TIGHT]  44.77,70.52 90 bottom
C485  10uF  [0402-TIGHT]  46.23,69.82 180 bottom
C486  0.1uF  [0402-TIGHT]  50.45,68.83 90 top
C487  1.0uF  [0402-TIGHT]  42.54,61.59 90 top
C488  0.1uF  [0402-TIGHT]  42.04,63.06 180 top
C489  15pF  [0402-TIGHT]  45.08,67.37 90 bottom
C490  15pF  [0402-TIGHT]  45.08,65.41 270 bottom
C491  3.0nF  [0402-TIGHT]  48.01,71.91 0 top
C492  0.1uF  [0402-TIGHT]  42.29,80.07 90 top
C493  4.7uF  [0402-TIGHT]  41.34,80.07 90 top
C494  DNP  [0402-TIGHT_NO_CREAM]  42.7,70.52 270 top
C495  DNP  [0402-TIGHT_NO_CREAM]  42.83,73.28 90 bottom
C496  2.2uF  [0402-TIGHT]  45.78,53.15 90 bottom
C497  2.2uF  [0402-TIGHT]  42.16,51.05 180 bottom
C498  4.7uF  [0402-TIGHT]  44.26,80.07 90 top
C499  0.1uF  [0402-TIGHT]  45.72,79.82 0 top
C500  0.1uF  [0402-TIGHT]  41.78,54.74 180 top
C501  12pF  [0402-TIGHT]  58.55,64.26 0 bottom
C502  12pF  [0402-TIGHT]  58.55,68.33 180 bottom
C503  270pF  [0402-TIGHT]  54.01,71.28 270 bottom
C504  270pF  [0402-TIGHT]  52.64,68.17 270 bottom
C505  10nF  [0402-TIGHT]  59.18,72.87 180 top
C506  0.1uF  [0402-TIGHT]  53.72,59.63 270 top
C507  100pF  [0402-TIGHT]  56.9,71.98 90 top
C508  0.1uF  [0402-TIGHT]  61.37,71.22 90 bottom
C509  0.1uF  [0402-TIGHT]  55.94,70.52 90 bottom
C510  10uF  [0402-TIGHT]  57.4,69.82 180 bottom
C511  0.1uF  [0402-TIGHT]  61.63,68.83 90 top
C512  1.0uF  [0402-TIGHT]  53.72,61.59 90 top
C513  0.1uF  [0402-TIGHT]  53.21,63.06 180 top
C514  15pF  [0402-TIGHT]  56.26,67.37 90 bottom
C515  15pF  [0402-TIGHT]  56.26,65.41 270 bottom
C516  3.0nF  [0402-TIGHT]  59.18,71.91 0 top
C517  0.1uF  [0402-TIGHT]  53.47,80.07 90 top
C518  4.7uF  [0402-TIGHT]  52.51,80.07 90 top
C519  DNP  [0402-TIGHT_NO_CREAM]  53.88,70.52 270 top
C520  DNP  [0402-TIGHT_NO_CREAM]  54.01,73.28 90 bottom
C521  2.2uF  [0402-TIGHT]  56.96,53.15 90 bottom
C522  2.2uF  [0402-TIGHT]  53.34,51.05 180 bottom
C523  4.7uF  [0402-TIGHT]  55.44,80.07 90 top
C524  0.1uF  [0402-TIGHT]  56.9,79.82 0 top
C525  0.1uF  [0402-TIGHT]  52.96,54.74 180 top
C526  12pF  [0402-TIGHT]  69.72,64.26 0 bottom
C527  12pF  [0402-TIGHT]  69.72,68.33 180 bottom
C528  270pF  [0402-TIGHT]  65.18,71.28 270 bottom
C529  270pF  [0402-TIGHT]  63.82,68.17 270 bottom
C530  10nF  [0402-TIGHT]  70.36,72.87 180 top
C531  0.1uF  [0402-TIGHT]  64.9,59.63 270 top
C532  100pF  [0402-TIGHT]  68.07,71.98 90 top
C533  0.1uF  [0402-TIGHT]  72.55,71.22 90 bottom
C534  0.1uF  [0402-TIGHT]  67.12,70.52 90 bottom
C535  10uF  [0402-TIGHT]  68.58,69.82 180 bottom
C536  0.1uF  [0402-TIGHT]  72.8,68.83 90 top
C537  1.0uF  [0402-TIGHT]  64.9,61.59 90 top
C538  0.1uF  [0402-TIGHT]  64.39,63.06 180 top
C539  15pF  [0402-TIGHT]  67.44,67.37 90 bottom
C540  15pF  [0402-TIGHT]  67.44,65.41 270 bottom
C541  3.0nF  [0402-TIGHT]  70.36,71.91 0 top
C542  0.1uF  [0402-TIGHT]  64.64,80.07 90 top
C543  4.7uF  [0402-TIGHT]  63.69,80.07 90 top
C544  DNP  [0402-TIGHT_NO_CREAM]  65.06,70.52 270 top
C545  DNP  [0402-TIGHT_NO_CREAM]  65.18,73.28 90 bottom
C546  2.2uF  [0402-TIGHT]  68.14,53.15 90 bottom
C547  2.2uF  [0402-TIGHT]  64.52,51.05 180 bottom
C548  4.7uF  [0402-TIGHT]  66.61,80.07 90 top
C549  0.1uF  [0402-TIGHT]  68.07,79.82 0 top
C550  0.1uF  [0402-TIGHT]  64.14,54.74 180 top
C551  12pF  [0402-TIGHT]  80.9,64.26 0 bottom
C552  12pF  [0402-TIGHT]  80.9,68.33 180 bottom
C553  270pF  [0402-TIGHT]  76.36,71.28 270 bottom
C554  270pF  [0402-TIGHT]  74.99,68.17 270 bottom
C555  10nF  [0402-TIGHT]  81.53,72.87 180 top
C556  0.1uF  [0402-TIGHT]  76.07,59.63 270 top
C557  100pF  [0402-TIGHT]  79.25,71.98 90 top
C558  0.1uF  [0402-TIGHT]  83.72,71.22 90 bottom
C559  0.1uF  [0402-TIGHT]  78.3,70.52 90 bottom
C560  10uF  [0402-TIGHT]  79.76,69.82 180 bottom
C561  0.1uF  [0402-TIGHT]  83.98,68.83 90 top
C562  1.0uF  [0402-TIGHT]  76.07,61.59 90 top
C563  0.1uF  [0402-TIGHT]  75.56,63.06 180 top
C564  15pF  [0402-TIGHT]  78.61,67.37 90 bottom
C565  15pF  [0402-TIGHT]  78.61,65.41 270 bottom
C566  3.0nF  [0402-TIGHT]  81.53,71.91 0 top
C567  0.1uF  [0402-TIGHT]  75.82,80.07 90 top
C568  4.7uF  [0402-TIGHT]  74.87,80.07 90 top
C569  DNP  [0402-TIGHT_NO_CREAM]  76.23,70.52 270 top
C570  DNP  [0402-TIGHT_NO_CREAM]  76.36,73.28 90 bottom
C571  2.2uF  [0402-TIGHT]  79.31,53.15 90 bottom
C572  2.2uF  [0402-TIGHT]  75.69,51.05 180 bottom
C573  4.7uF  [0402-TIGHT]  77.79,80.07 90 top
C574  0.1uF  [0402-TIGHT]  79.25,79.82 0 top
C575  0.1uF  [0402-TIGHT]  75.31,54.74 180 top
C576  12pF  [0402-TIGHT]  92.08,64.26 0 bottom
C577  12pF  [0402-TIGHT]  92.08,68.33 180 bottom
C578  270pF  [0402-TIGHT]  87.53,71.28 270 bottom
C579  270pF  [0402-TIGHT]  86.17,68.17 270 bottom
C580  10nF  [0402-TIGHT]  92.71,72.87 180 top
C581  0.1uF  [0402-TIGHT]  87.25,59.63 270 top
C582  100pF  [0402-TIGHT]  90.42,71.98 90 top
C583  0.1uF  [0402-TIGHT]  94.9,71.22 90 bottom
C584  0.1uF  [0402-TIGHT]  89.47,70.52 90 bottom
C585  10uF  [0402-TIGHT]  90.93,69.82 180 bottom
C586  0.1uF  [0402-TIGHT]  95.15,68.83 90 top
C587  1.0uF  [0402-TIGHT]  87.25,61.59 90 top
C588  0.1uF  [0402-TIGHT]  86.74,63.06 180 top
C589  15pF  [0402-TIGHT]  89.79,67.37 90 bottom
C590  15pF  [0402-TIGHT]  89.79,65.41 270 bottom
C591  3.0nF  [0402-TIGHT]  92.71,71.91 0 top
C592  0.1uF  [0402-TIGHT]  87,80.07 90 top
C593  4.7uF  [0402-TIGHT]  86.04,80.07 90 top
C594  DNP  [0402-TIGHT_NO_CREAM]  87.41,70.52 270 top
C595  DNP  [0402-TIGHT_NO_CREAM]  87.53,73.28 90 bottom
C596  2.2uF  [0402-TIGHT]  90.49,53.15 90 bottom
C597  2.2uF  [0402-TIGHT]  86.87,51.05 180 bottom
C598  4.7uF  [0402-TIGHT]  88.96,80.07 90 top
C599  0.1uF  [0402-TIGHT]  90.42,79.82 0 top
C600  0.1uF  [0402-TIGHT]  86.49,54.74 180 top
C601  12pF  [0402-TIGHT]  103.25,64.26 0 bottom
C602  12pF  [0402-TIGHT]  103.25,68.33 180 bottom
C603  270pF  [0402-TIGHT]  98.71,71.28 270 bottom
C604  270pF  [0402-TIGHT]  97.35,68.17 270 bottom
C605  10nF  [0402-TIGHT]  103.89,72.87 180 top
C606  0.1uF  [0402-TIGHT]  98.42,59.63 270 top
C607  100pF  [0402-TIGHT]  101.6,71.98 90 top
C608  0.1uF  [0402-TIGHT]  106.08,71.22 90 bottom
C609  0.1uF  [0402-TIGHT]  100.65,70.52 90 bottom
C610  10uF  [0402-TIGHT]  102.11,69.82 180 bottom
C611  0.1uF  [0402-TIGHT]  106.33,68.83 90 top
C612  1.0uF  [0402-TIGHT]  98.42,61.59 90 top
C613  0.1uF  [0402-TIGHT]  97.92,63.06 180 top
C614  15pF  [0402-TIGHT]  100.97,67.37 90 bottom
C615  15pF  [0402-TIGHT]  100.97,65.41 270 bottom
C616  3.0nF  [0402-TIGHT]  103.89,71.91 0 top
C617  0.1uF  [0402-TIGHT]  98.17,80.07 90 top
C618  4.7uF  [0402-TIGHT]  97.22,80.07 90 top
C619  DNP  [0402-TIGHT_NO_CREAM]  98.58,70.52 270 top
C620  DNP  [0402-TIGHT_NO_CREAM]  98.71,73.28 90 bottom
C621  2.2uF  [0402-TIGHT]  101.66,53.15 90 bottom
C622  2.2uF  [0402-TIGHT]  98.04,51.05 180 bottom
C623  4.7uF  [0402-TIGHT]  100.14,80.07 90 top
C624  0.1uF  [0402-TIGHT]  101.6,79.82 0 top
C625  0.1uF  [0402-TIGHT]  97.66,54.74 180 top
C626  12pF  [0402-TIGHT]  114.43,64.26 0 bottom
C627  12pF  [0402-TIGHT]  114.43,68.33 180 bottom
C628  270pF  [0402-TIGHT]  109.89,71.28 270 bottom
C629  270pF  [0402-TIGHT]  108.52,68.17 270 bottom
C630  10nF  [0402-TIGHT]  115.06,72.87 180 top
C631  0.1uF  [0402-TIGHT]  109.6,59.63 270 top
C632  100pF  [0402-TIGHT]  112.78,71.98 90 top
C633  0.1uF  [0402-TIGHT]  117.25,71.22 90 bottom
C634  0.1uF  [0402-TIGHT]  111.82,70.52 90 bottom
C635  10uF  [0402-TIGHT]  113.28,69.82 180 bottom
C636  0.1uF  [0402-TIGHT]  117.51,68.83 90 top
C637  1.0uF  [0402-TIGHT]  109.6,61.59 90 top
C638  0.1uF  [0402-TIGHT]  109.09,63.06 180 top
C639  15pF  [0402-TIGHT]  112.14,67.37 90 bottom
C640  15pF  [0402-TIGHT]  112.14,65.41 270 bottom
C641  3.0nF  [0402-TIGHT]  115.06,71.91 0 top
C642  0.1uF  [0402-TIGHT]  109.35,80.07 90 top
C643  4.7uF  [0402-TIGHT]  108.39,80.07 90 top
C644  DNP  [0402-TIGHT_NO_CREAM]  109.76,70.52 270 top
C645  DNP  [0402-TIGHT_NO_CREAM]  109.89,73.28 90 bottom
C646  2.2uF  [0402-TIGHT]  112.84,53.15 90 bottom
C647  2.2uF  [0402-TIGHT]  109.22,51.05 180 bottom
C648  4.7uF  [0402-TIGHT]  111.32,80.07 90 top
C649  0.1uF  [0402-TIGHT]  112.78,79.82 0 top
C650  0.1uF  [0402-TIGHT]  108.84,54.74 180 top
C651  12pF  [0402-TIGHT]  125.6,64.26 0 bottom
C652  12pF  [0402-TIGHT]  125.6,68.33 180 bottom
C653  270pF  [0402-TIGHT]  121.06,71.28 270 bottom
C654  270pF  [0402-TIGHT]  119.7,68.17 270 bottom
C655  10nF  [0402-TIGHT]  126.24,72.87 180 top
C656  0.1uF  [0402-TIGHT]  120.78,59.63 270 top
C657  100pF  [0402-TIGHT]  123.95,71.98 90 top
C658  0.1uF  [0402-TIGHT]  128.43,71.22 90 bottom
C659  0.1uF  [0402-TIGHT]  123,70.52 90 bottom
C660  10uF  [0402-TIGHT]  124.46,69.82 180 bottom
C661  0.1uF  [0402-TIGHT]  128.68,68.83 90 top
C662  1.0uF  [0402-TIGHT]  120.78,61.59 90 top
C663  0.1uF  [0402-TIGHT]  120.27,63.06 180 top
C664  15pF  [0402-TIGHT]  123.32,67.37 90 bottom
C665  15pF  [0402-TIGHT]  123.32,65.41 270 bottom
C666  3.0nF  [0402-TIGHT]  126.24,71.91 0 top
C667  0.1uF  [0402-TIGHT]  120.52,80.07 90 top
C668  4.7uF  [0402-TIGHT]  119.57,80.07 90 top
C669  DNP  [0402-TIGHT_NO_CREAM]  120.94,70.52 270 top
C670  DNP  [0402-TIGHT_NO_CREAM]  121.06,73.28 90 bottom
C671  2.2uF  [0402-TIGHT]  124.02,53.15 90 bottom
C672  2.2uF  [0402-TIGHT]  120.4,51.05 180 bottom
C673  4.7uF  [0402-TIGHT]  122.49,80.07 90 top
C674  0.1uF  [0402-TIGHT]  123.95,79.82 0 top
C675  0.1uF  [0402-TIGHT]  120.02,54.74 180 top
C676  12pF  [0402-TIGHT]  136.78,64.26 0 bottom
C677  12pF  [0402-TIGHT]  136.78,68.33 180 bottom
C678  270pF  [0402-TIGHT]  132.24,71.28 270 bottom
C679  270pF  [0402-TIGHT]  130.87,68.17 270 bottom
C680  10nF  [0402-TIGHT]  137.41,72.87 180 top
C681  0.1uF  [0402-TIGHT]  131.95,59.63 270 top
C682  100pF  [0402-TIGHT]  135.13,71.98 90 top
C683  0.1uF  [0402-TIGHT]  139.6,71.22 90 bottom
C684  0.1uF  [0402-TIGHT]  134.18,70.52 90 bottom
C685  10uF  [0402-TIGHT]  135.64,69.82 180 bottom
C686  0.1uF  [0402-TIGHT]  139.86,68.83 90 top
C687  1.0uF  [0402-TIGHT]  131.95,61.59 90 top
C688  0.1uF  [0402-TIGHT]  131.44,63.06 180 top
C689  15pF  [0402-TIGHT]  134.49,67.37 90 bottom
C690  15pF  [0402-TIGHT]  134.49,65.41 270 bottom
C691  3.0nF  [0402-TIGHT]  137.41,71.91 0 top
C692  0.1uF  [0402-TIGHT]  131.7,80.07 90 top
C693  4.7uF  [0402-TIGHT]  130.75,80.07 90 top
C694  DNP  [0402-TIGHT_NO_CREAM]  132.11,70.52 270 top
C695  DNP  [0402-TIGHT_NO_CREAM]  132.24,73.28 90 bottom
C696  2.2uF  [0402-TIGHT]  135.19,53.15 90 bottom
C697  2.2uF  [0402-TIGHT]  131.57,51.05 180 bottom
C698  4.7uF  [0402-TIGHT]  133.67,80.07 90 top
C699  0.1uF  [0402-TIGHT]  135.13,79.82 0 top
C700  0.1uF  [0402-TIGHT]  131.19,54.74 180 top
C701  12pF  [0402-TIGHT]  147.96,64.26 0 bottom
C702  12pF  [0402-TIGHT]  147.96,68.33 180 bottom
C703  270pF  [0402-TIGHT]  143.41,71.28 270 bottom
C704  270pF  [0402-TIGHT]  142.05,68.17 270 bottom
C705  10nF  [0402-TIGHT]  148.59,72.87 180 top
C706  0.1uF  [0402-TIGHT]  143.13,59.63 270 top
C707  100pF  [0402-TIGHT]  146.3,71.98 90 top
C708  0.1uF  [0402-TIGHT]  150.78,71.22 90 bottom
C709  0.1uF  [0402-TIGHT]  145.35,70.52 90 bottom
C710  10uF  [0402-TIGHT]  146.81,69.82 180 bottom
C711  0.1uF  [0402-TIGHT]  151.03,68.83 90 top
C712  1.0uF  [0402-TIGHT]  143.13,61.59 90 top
C713  0.1uF  [0402-TIGHT]  142.62,63.06 180 top
C714  15pF  [0402-TIGHT]  145.67,67.37 90 bottom
C715  15pF  [0402-TIGHT]  145.67,65.41 270 bottom
C716  3.0nF  [0402-TIGHT]  148.59,71.91 0 top
C717  0.1uF  [0402-TIGHT]  142.88,80.07 90 top
C718  4.7uF  [0402-TIGHT]  141.92,80.07 90 top
C719  DNP  [0402-TIGHT_NO_CREAM]  143.29,70.52 270 top
C720  DNP  [0402-TIGHT_NO_CREAM]  143.41,73.28 90 bottom
C721  2.2uF  [0402-TIGHT]  146.37,53.15 90 bottom
C722  2.2uF  [0402-TIGHT]  142.75,51.05 180 bottom
C723  4.7uF  [0402-TIGHT]  144.84,80.07 90 top
C724  0.1uF  [0402-TIGHT]  146.3,79.82 0 top
C725  0.1uF  [0402-TIGHT]  142.37,54.74 180 top
C726  12pF  [0402-TIGHT]  159.13,64.26 0 bottom
C727  12pF  [0402-TIGHT]  159.13,68.33 180 bottom
C728  270pF  [0402-TIGHT]  154.59,71.28 270 bottom
C729  270pF  [0402-TIGHT]  153.23,68.17 270 bottom
C730  10nF  [0402-TIGHT]  159.77,72.87 180 top
C731  0.1uF  [0402-TIGHT]  154.31,59.63 270 top
C732  100pF  [0402-TIGHT]  157.48,71.98 90 top
C733  0.1uF  [0402-TIGHT]  161.96,71.22 90 bottom
C734  0.1uF  [0402-TIGHT]  156.53,70.52 90 bottom
C735  10uF  [0402-TIGHT]  157.99,69.82 180 bottom
C736  0.1uF  [0402-TIGHT]  162.21,68.83 90 top
C737  1.0uF  [0402-TIGHT]  154.31,61.59 90 top
C738  0.1uF  [0402-TIGHT]  153.8,63.06 180 top
C739  15pF  [0402-TIGHT]  156.84,67.37 90 bottom
C740  15pF  [0402-TIGHT]  156.84,65.41 270 bottom
C741  3.0nF  [0402-TIGHT]  159.77,71.91 0 top
C742  0.1uF  [0402-TIGHT]  154.05,80.07 90 top
C743  4.7uF  [0402-TIGHT]  153.1,80.07 90 top
C744  DNP  [0402-TIGHT_NO_CREAM]  154.46,70.52 270 top
C745  DNP  [0402-TIGHT_NO_CREAM]  154.59,73.28 90 bottom
C746  2.2uF  [0402-TIGHT]  157.54,53.15 90 bottom
C747  2.2uF  [0402-TIGHT]  153.92,51.05 180 bottom
C748  4.7uF  [0402-TIGHT]  156.02,80.07 90 top
C749  0.1uF  [0402-TIGHT]  157.48,79.82 0 top
C750  0.1uF  [0402-TIGHT]  153.54,54.74 180 top
C751  12pF  [0402-TIGHT]  170.31,64.26 0 bottom
C752  12pF  [0402-TIGHT]  170.31,68.33 180 bottom
C753  270pF  [0402-TIGHT]  165.77,71.28 270 bottom
C754  270pF  [0402-TIGHT]  164.4,68.17 270 bottom
C755  10nF  [0402-TIGHT]  170.94,72.87 180 top
C756  0.1uF  [0402-TIGHT]  165.48,59.63 270 top
C757  100pF  [0402-TIGHT]  168.66,71.98 90 top
C758  0.1uF  [0402-TIGHT]  173.13,71.22 90 bottom
C759  0.1uF  [0402-TIGHT]  167.7,70.52 90 bottom
C760  10uF  [0402-TIGHT]  169.16,69.82 180 bottom
C761  0.1uF  [0402-TIGHT]  173.39,68.83 90 top
C762  1.0uF  [0402-TIGHT]  165.48,61.59 90 top
C763  0.1uF  [0402-TIGHT]  164.97,63.06 180 top
C764  15pF  [0402-TIGHT]  168.02,67.37 90 bottom
C765  15pF  [0402-TIGHT]  168.02,65.41 270 bottom
C766  3.0nF  [0402-TIGHT]  170.94,71.91 0 top
C767  0.1uF  [0402-TIGHT]  165.23,80.07 90 top
C768  4.7uF  [0402-TIGHT]  164.27,80.07 90 top
C769  DNP  [0402-TIGHT_NO_CREAM]  165.64,70.52 270 top
C770  DNP  [0402-TIGHT_NO_CREAM]  165.77,73.28 90 bottom
C771  2.2uF  [0402-TIGHT]  168.72,53.15 90 bottom
C772  2.2uF  [0402-TIGHT]  165.1,51.05 180 bottom
C773  4.7uF  [0402-TIGHT]  167.2,80.07 90 top
C774  0.1uF  [0402-TIGHT]  168.66,79.82 0 top
C775  0.1uF  [0402-TIGHT]  164.72,54.74 180 top
C776  12pF  [0402-TIGHT]  181.48,64.26 0 bottom
C777  12pF  [0402-TIGHT]  181.48,68.33 180 bottom
C778  270pF  [0402-TIGHT]  176.94,71.28 270 bottom
C779  270pF  [0402-TIGHT]  175.58,68.17 270 bottom
C780  10nF  [0402-TIGHT]  182.12,72.87 180 top
C781  0.1uF  [0402-TIGHT]  176.66,59.63 270 top
C782  100pF  [0402-TIGHT]  179.83,71.98 90 top
C783  0.1uF  [0402-TIGHT]  184.31,71.22 90 bottom
C784  0.1uF  [0402-TIGHT]  178.88,70.52 90 bottom
C785  10uF  [0402-TIGHT]  180.34,69.82 180 bottom
C786  0.1uF  [0402-TIGHT]  184.56,68.83 90 top
C787  1.0uF  [0402-TIGHT]  176.66,61.59 90 top
C788  0.1uF  [0402-TIGHT]  176.15,63.06 180 top
C789  15pF  [0402-TIGHT]  179.2,67.37 90 bottom
C790  15pF  [0402-TIGHT]  179.2,65.41 270 bottom
C791  3.0nF  [0402-TIGHT]  182.12,71.91 0 top
C792  0.1uF  [0402-TIGHT]  176.4,80.07 90 top
C793  4.7uF  [0402-TIGHT]  175.45,80.07 90 top
C794  DNP  [0402-TIGHT_NO_CREAM]  176.82,70.52 270 top
C795  DNP  [0402-TIGHT_NO_CREAM]  176.94,73.28 90 bottom
C796  2.2uF  [0402-TIGHT]  179.9,53.15 90 bottom
C797  2.2uF  [0402-TIGHT]  176.28,51.05 180 bottom
C798  4.7uF  [0402-TIGHT]  178.37,80.07 90 top
C799  0.1uF  [0402-TIGHT]  179.83,79.82 0 top
C800  0.1uF  [0402-TIGHT]  175.9,54.74 180 top
D1  WS2812_2020  [WS2812-2020]  16.13,38.8 90 top
D2  WS2812_2020  [WS2812-2020]  27.3,38.8 90 top
D3  WS2812_2020  [WS2812-2020]  38.48,38.8 90 top
D4  WS2812_2020  [WS2812-2020]  49.66,38.8 90 top
D5  WS2812_2020  [WS2812-2020]  60.83,38.8 90 top
D6  WS2812_2020  [WS2812-2020]  72.01,38.8 90 top
D7  WS2812_2020  [WS2812-2020]  83.19,38.8 90 top
D8  WS2812_2020  [WS2812-2020]  94.36,38.8 90 top
D9  WS2812_2020  [WS2812-2020]  105.54,38.8 90 top
D10  WS2812_2020  [WS2812-2020]  116.71,38.8 90 top
D11  WS2812_2020  [WS2812-2020]  127.89,38.8 90 top
D12  WS2812_2020  [WS2812-2020]  139.06,38.8 90 top
D13  WS2812_2020  [WS2812-2020]  150.24,38.8 90 top
D14  WS2812_2020  [WS2812-2020]  161.42,38.8 90 top
D15  WS2812_2020  [WS2812-2020]  172.59,38.8 90 top
D16  WS2812_2020  [WS2812-2020]  183.77,38.8 90 top
D17  WS2812_2020  [WS2812-2020]  8.25,56.71 270 top
D18  WS2812_2020  [WS2812-2020]  19.43,56.71 270 top
D19  WS2812_2020  [WS2812-2020]  30.61,56.71 270 top
D20  WS2812_2020  [WS2812-2020]  41.78,56.71 270 top
D21  WS2812_2020  [WS2812-2020]  52.96,56.71 270 top